# Altium PCB NonRGB-v1.PcbDoc (part 1 of 2)
Units mil, origin at the board's own origin, x right, y up, seen from the top; angles counter-clockwise.
Board outline 14224 x 14224 mil, 4 copper layers (Top Layer, Internal Plane 1, Internal Plane 2, Bottom Layer), stack 18.2 mil thick; 328 components, 111 nets, 825 pads, 445 vias.
Unrouted connection lines stored in the file: 71.
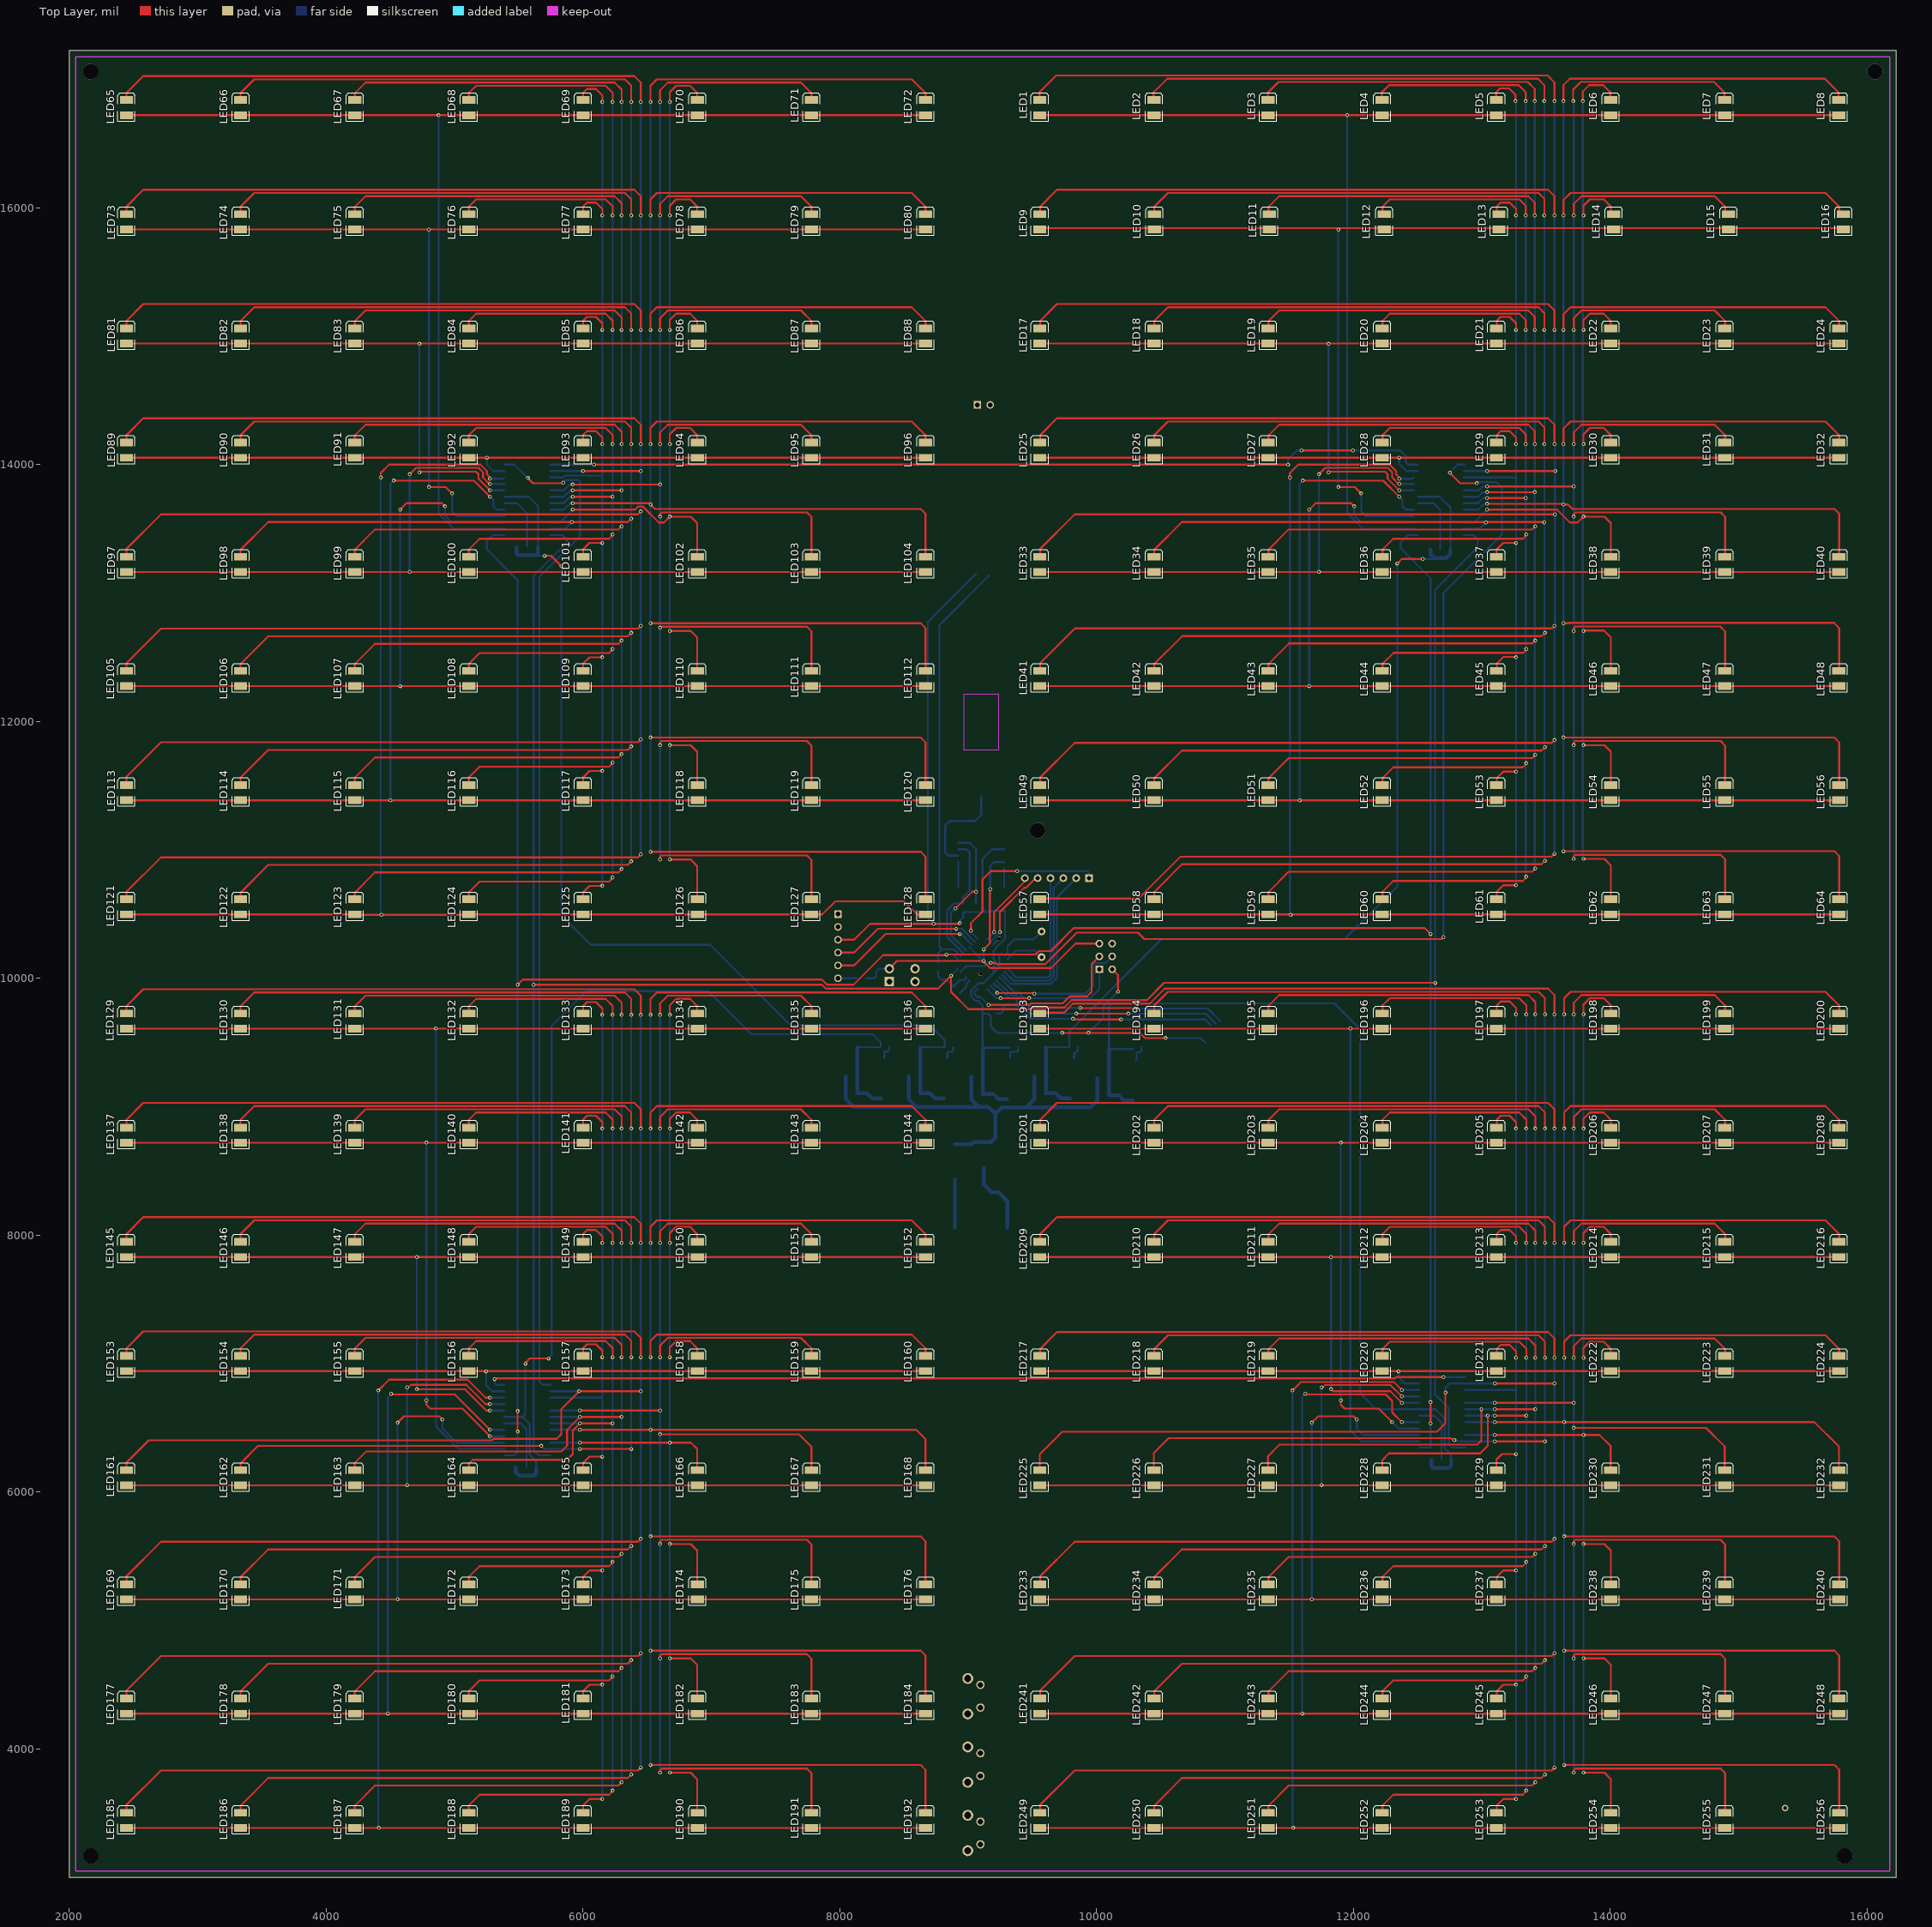
[diagram p0: Top Layer view]
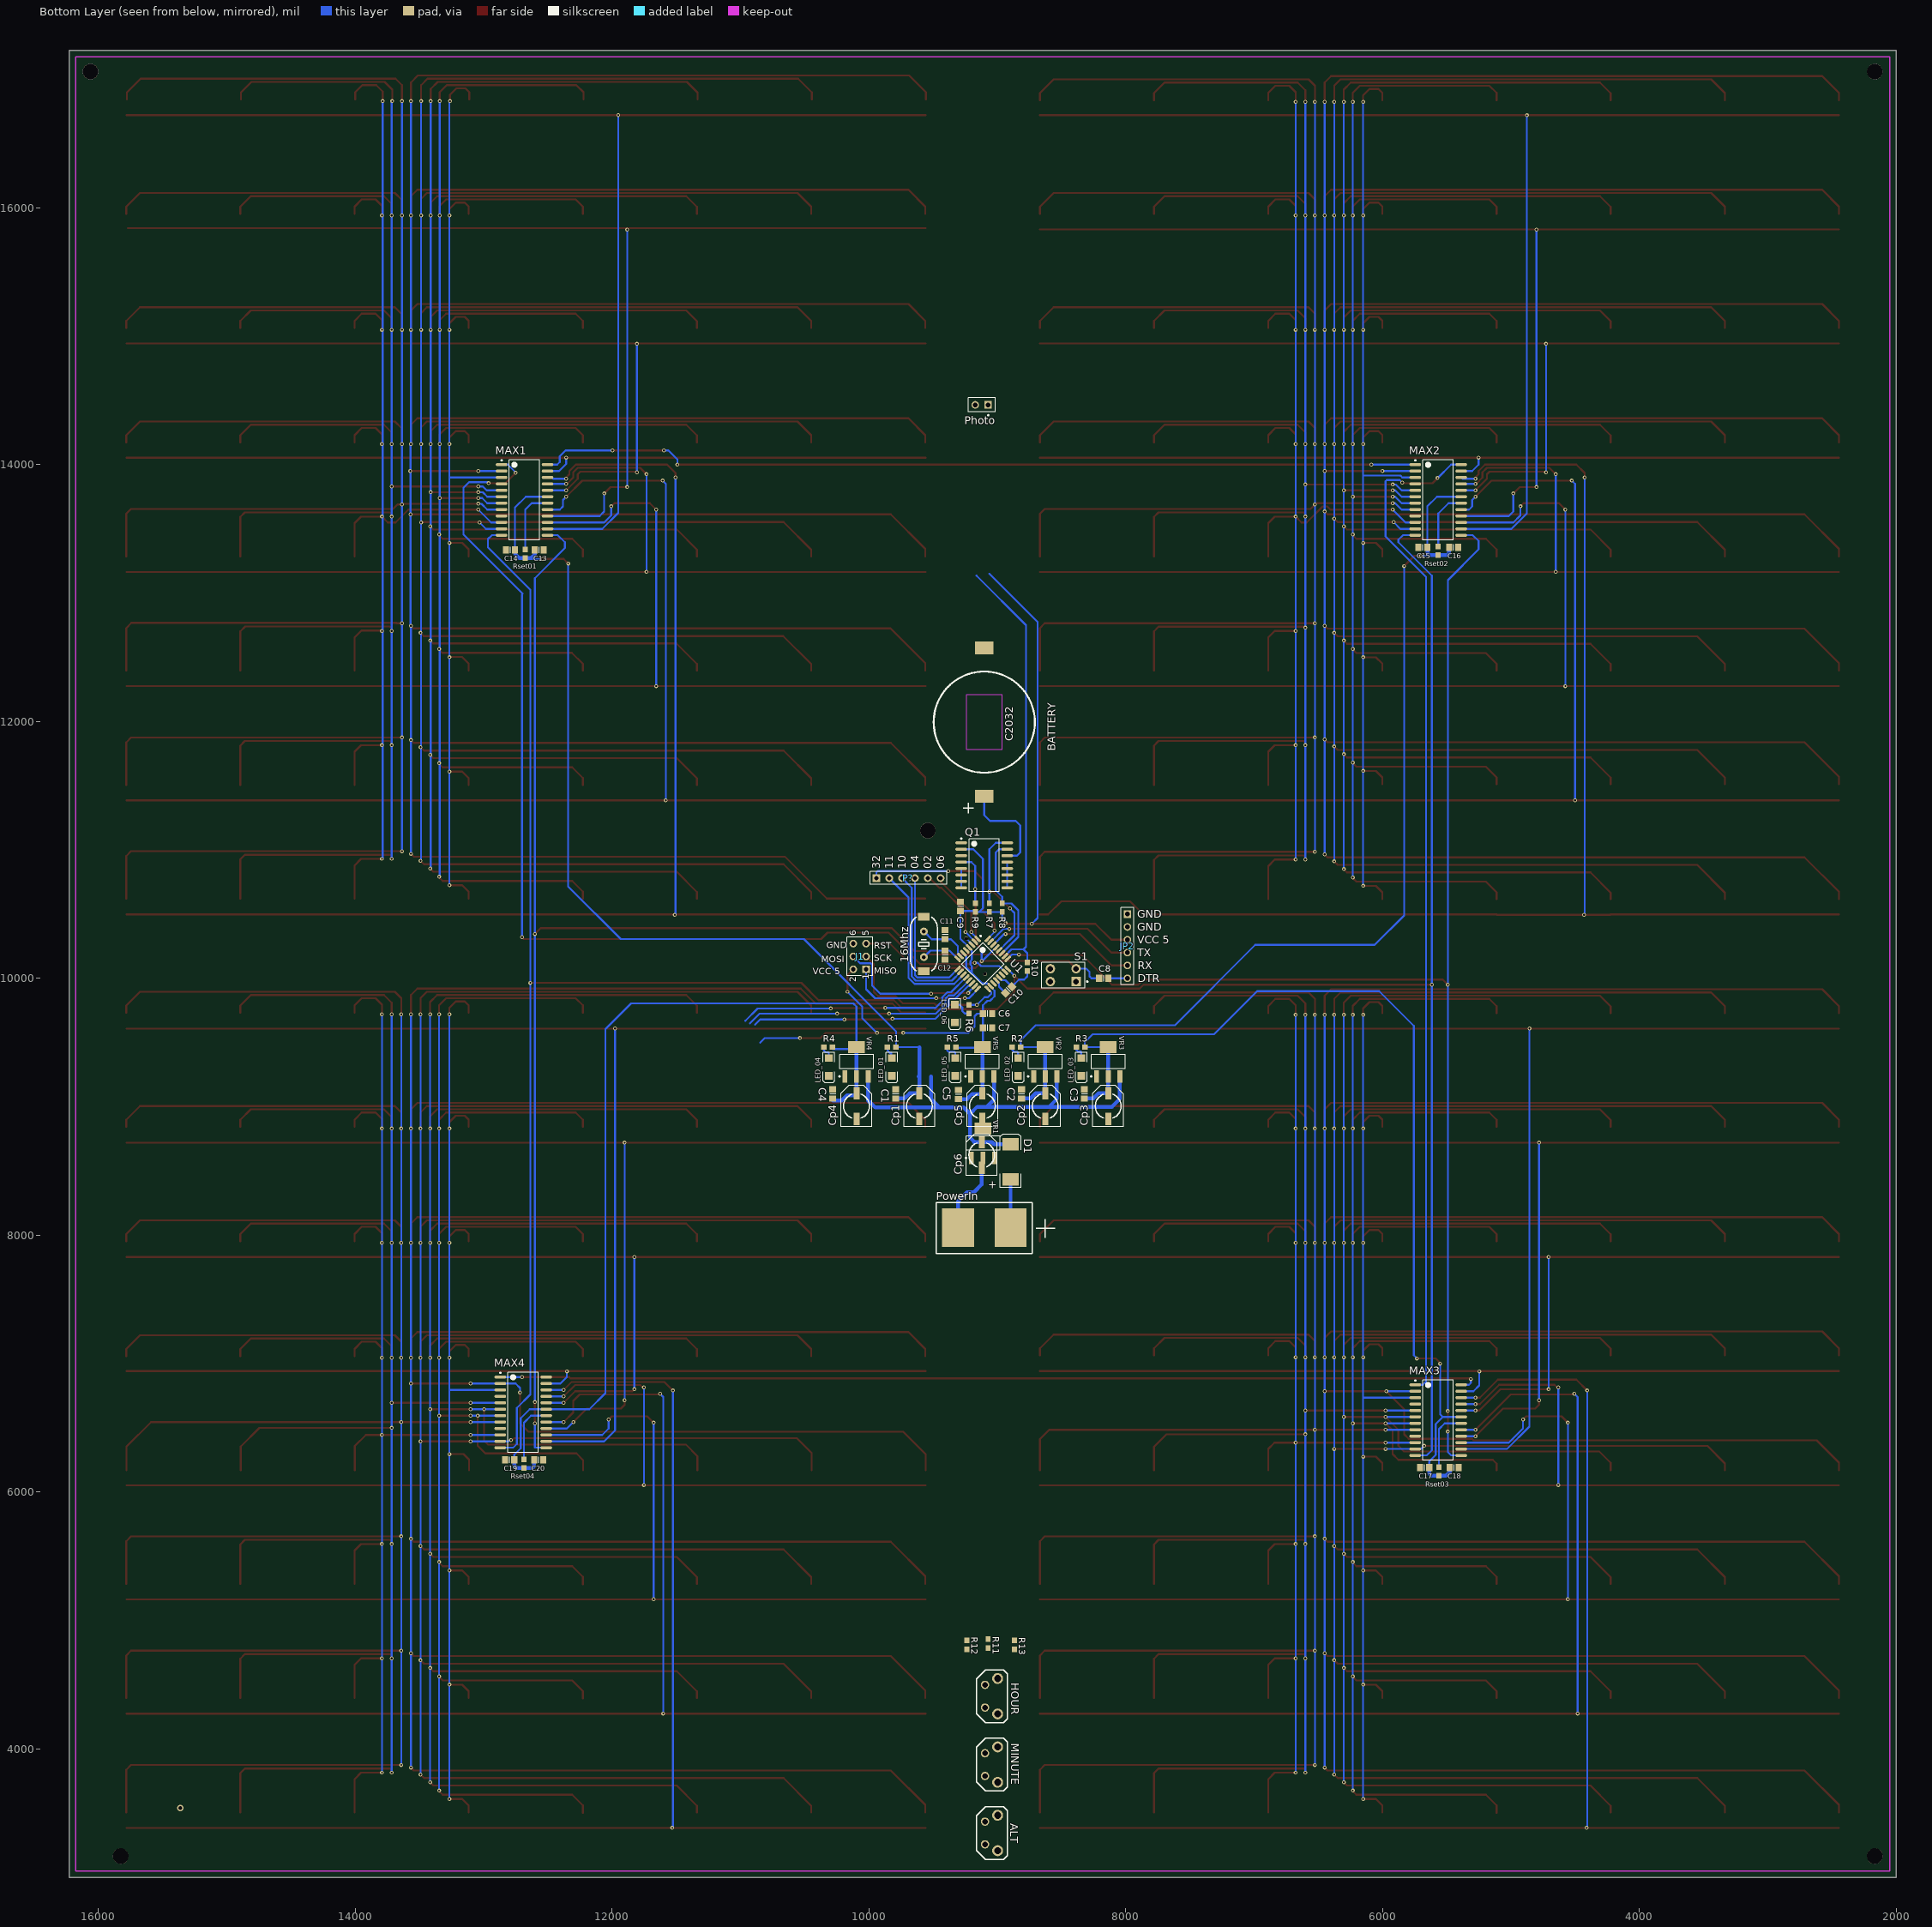
[diagram p1: Bottom Layer view, seen from below]
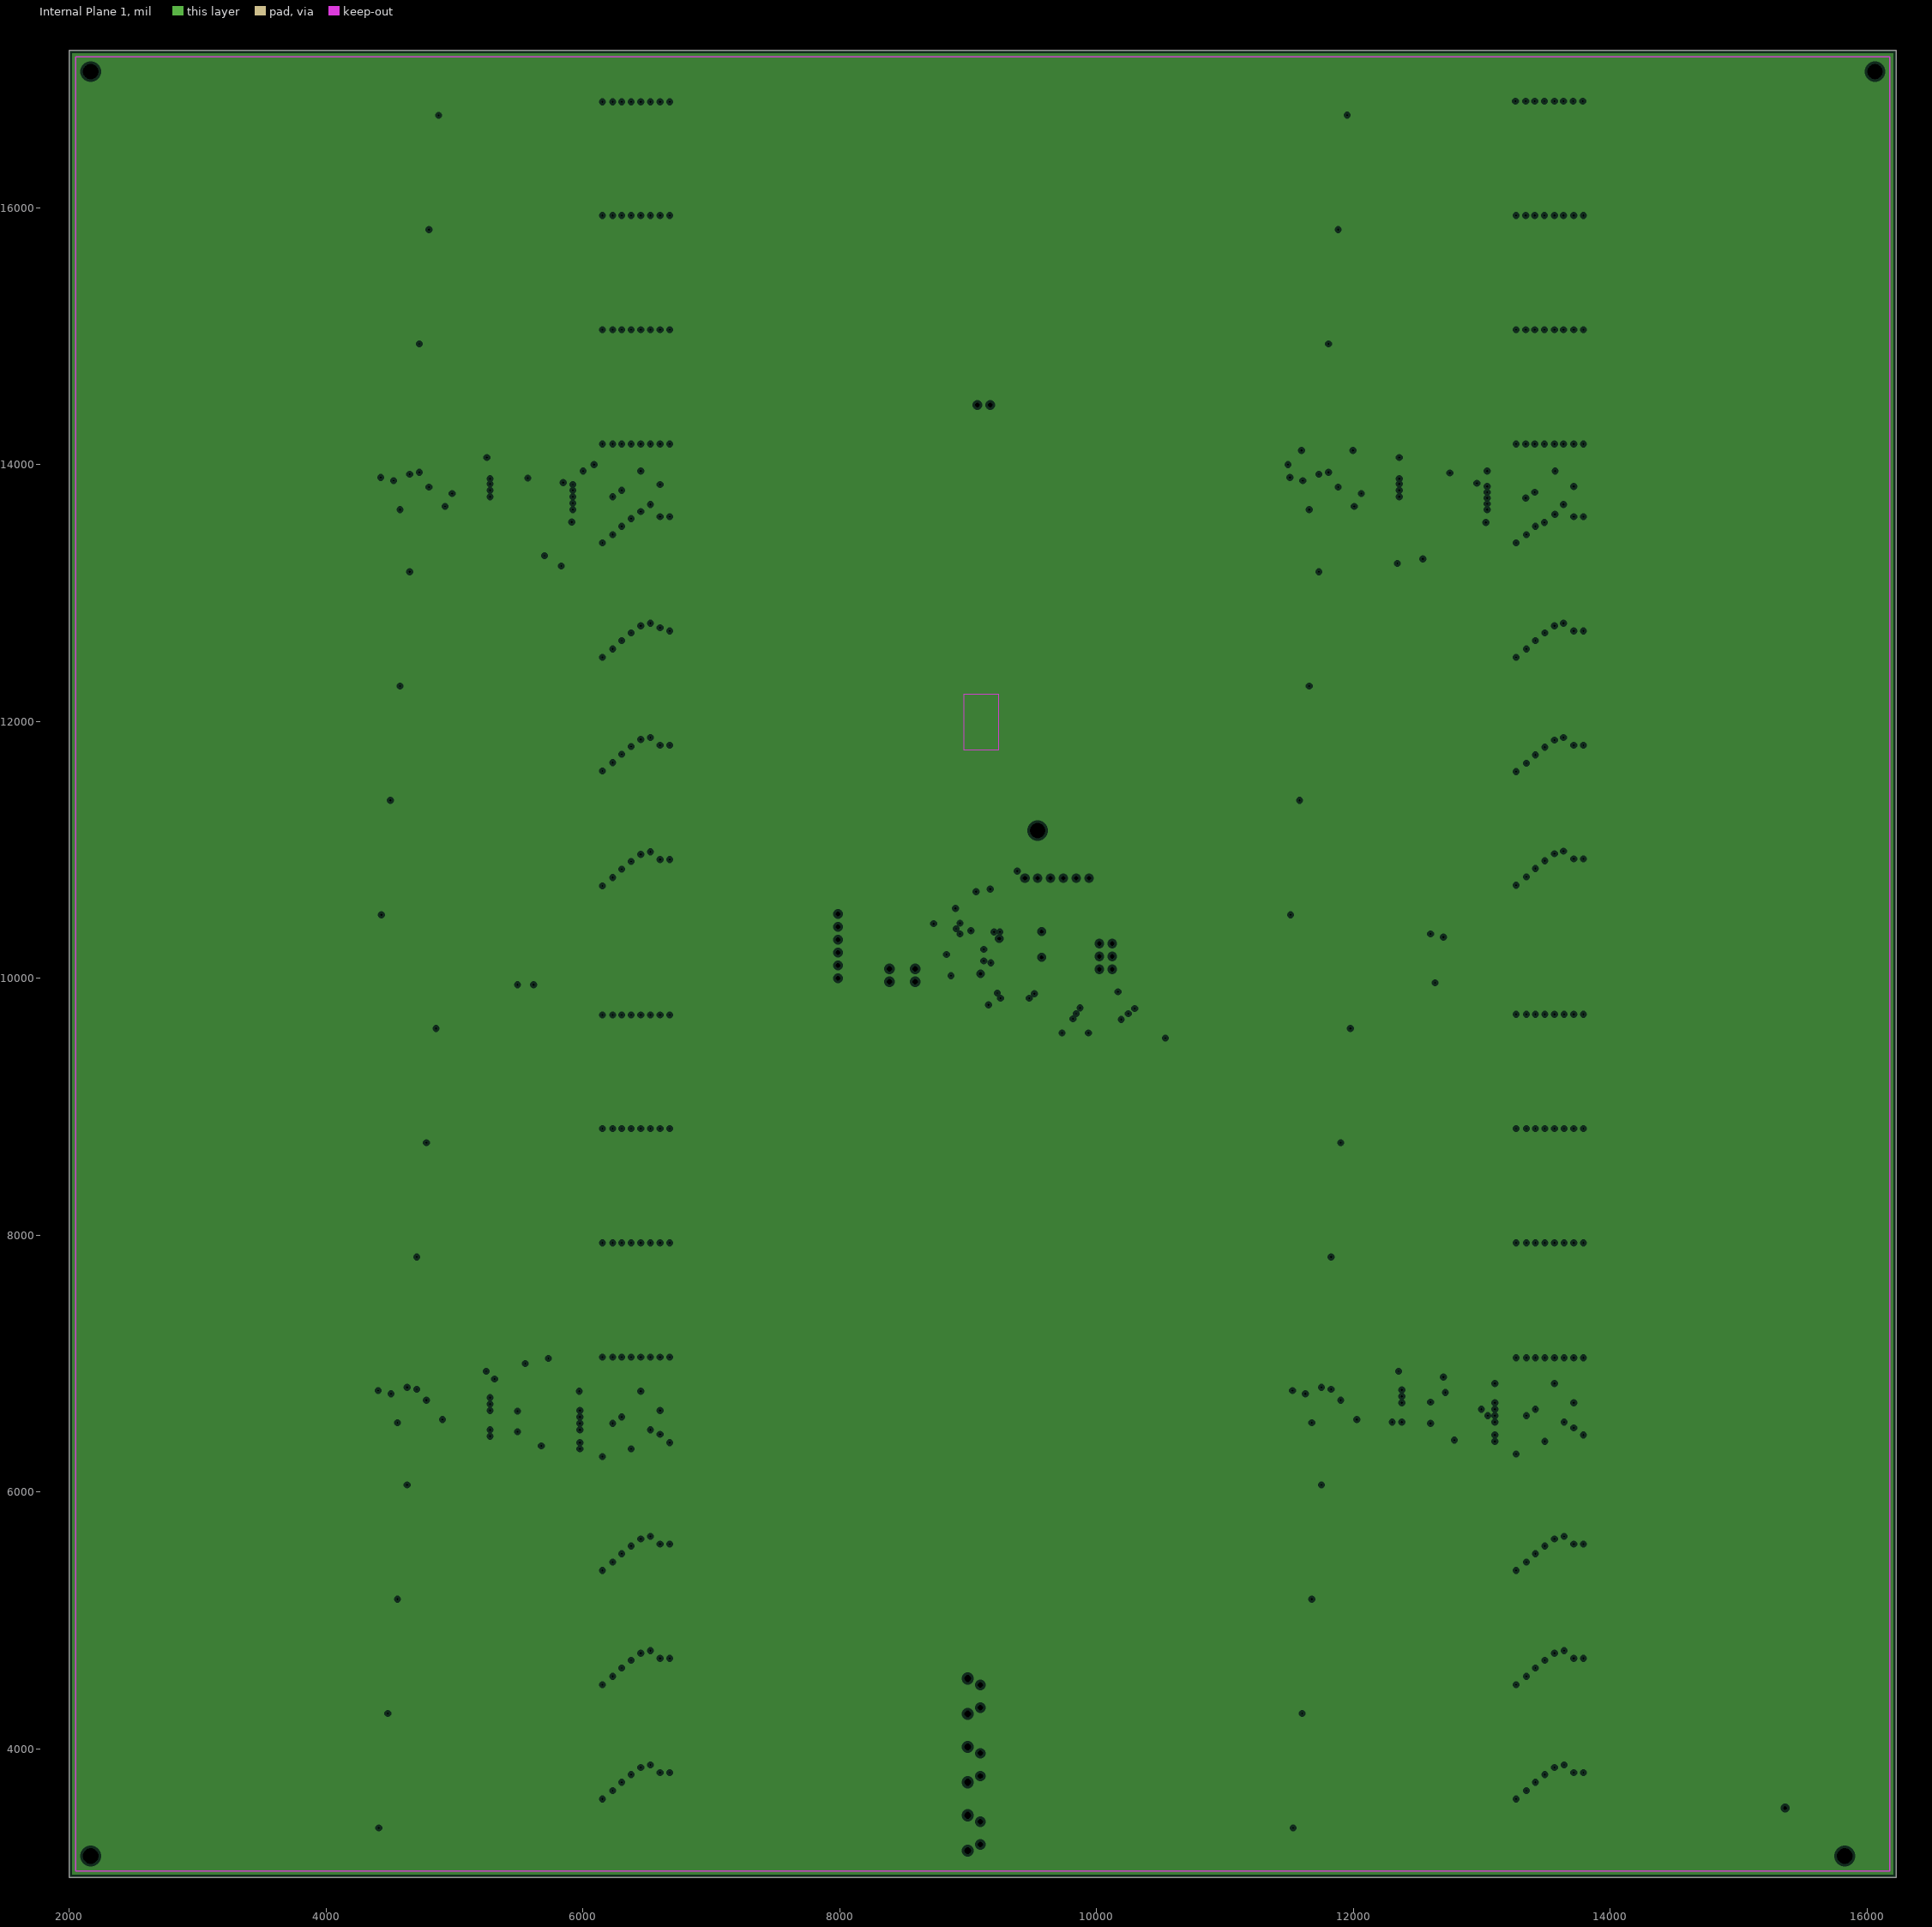
[diagram p2: Internal Plane 1, clearances drawn from the general rule]
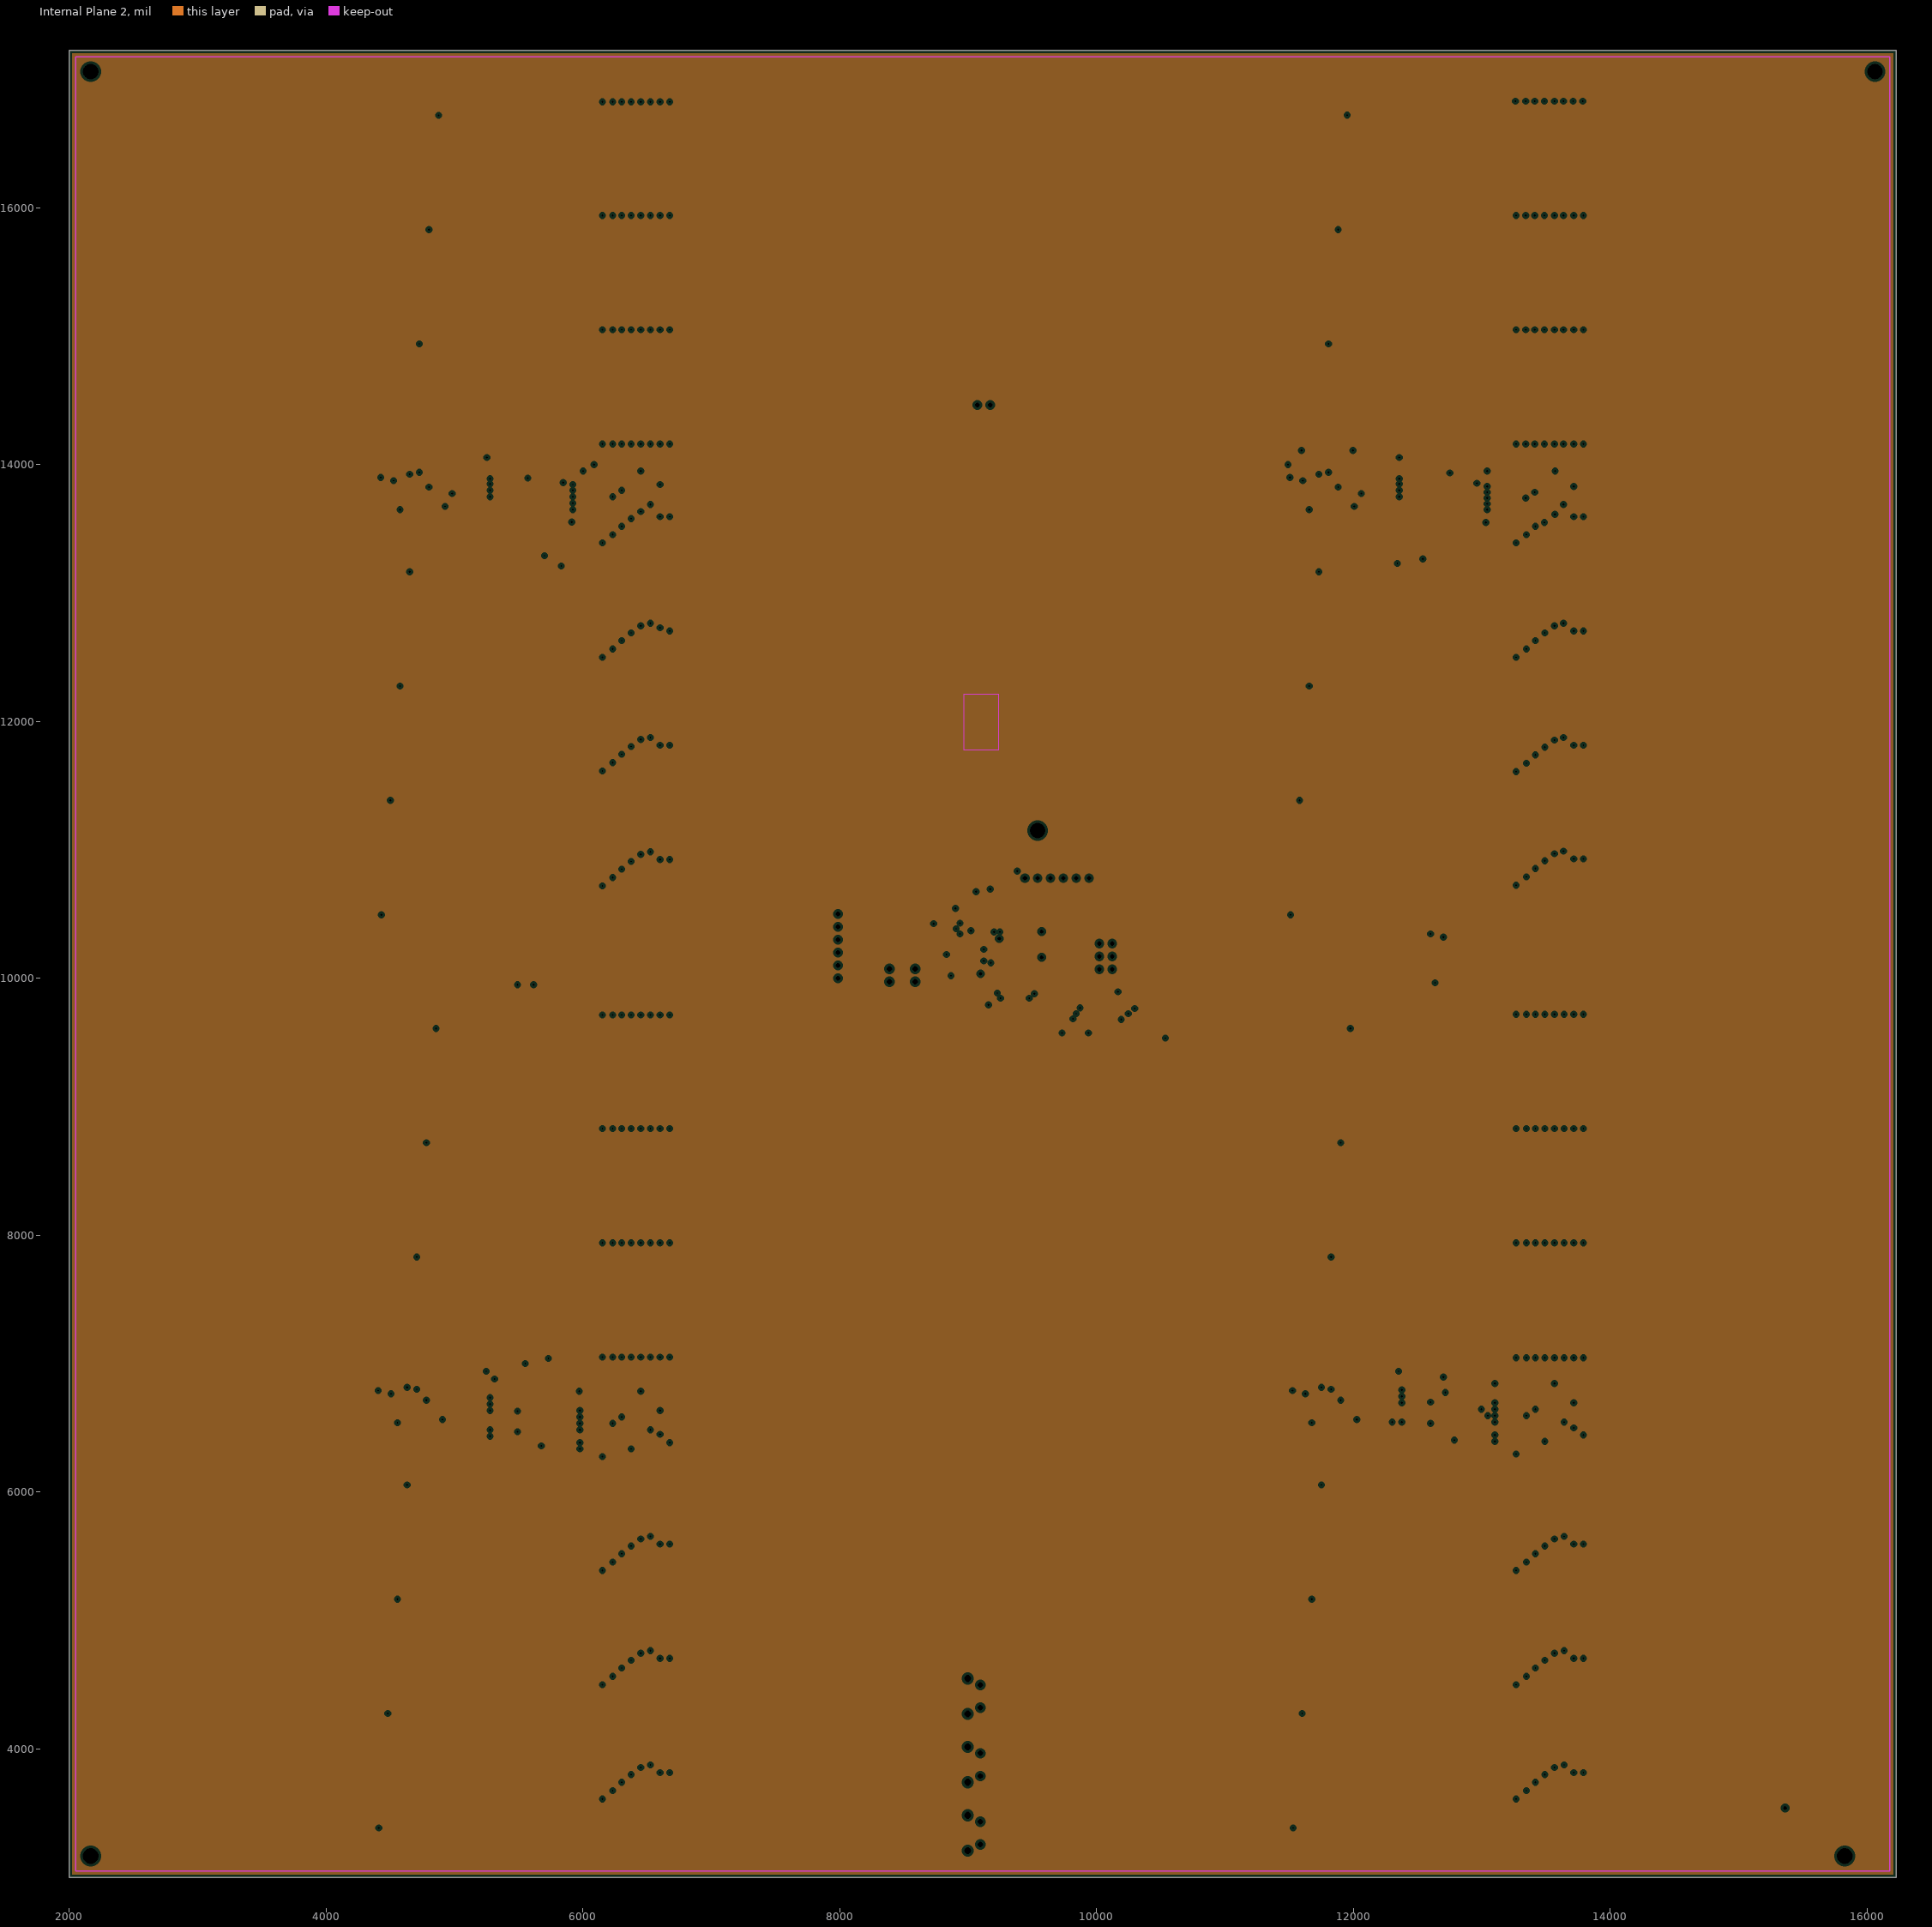
[diagram p3: Internal Plane 2, clearances drawn from the general rule]

## Layer stack, top to bottom
Top Solder: solder mask 0.4, Solder Resist, Dk 3.5
Top Layer: signal copper 1.4
Internal Plane 1: plane copper 1.4
Internal Plane 2: plane copper 1.4
Dielectric 1: dielectric 12.6, FR-4, Dk 4.8
Bottom Layer: signal copper 1.4
Bottom Solder: solder mask 0.4, Solder Resist, Dk 3.5

## Board outline
2000,3000 16224,3000 16224,17224 2000,17224

## Design rules (kind name [scope] priority, off if disabled: settings)
Clearance [All] p1: gap=5
PlaneClearance [All] p1: clearance=20
PlaneConnect [All] p1: planeconnectstyle=Relief reliefexpansion=20 reliefentries=4 reliefconductorwidth=15 reliefairgap=10
PolygonConnect [All] p1: connectstyle=Relief reliefconductorwidth=15 reliefentries=4 polygonreliefangle="90 Angle" airgapwidth=10
RoutingVias [All] p1: holewidth=15 width=30 viastyle="Through Hole" minholewidth=15 minwidth=30 maxholewidth=28 maxwidth=50
SolderMaskExpansion [All] p1: expansion=4
Width [All] p1: maxlimit=30 minlimit=10 preferedwidth=15 minimp=50.000000 maximp=50.000000 favimp=50.000000
28 further rules are at their usual default settings.

## Classes and differential pairs
component class U_LED_Driver_and_LEDs_01: C13 C14 LED1 LED2 LED3 LED4 LED5 LED6 LED7 LED8 LED9 LED10 LED11 LED12 LED13 LED14 LED15 LED16 LED17 LED18 LED19 LED20 LED21 LED22 LED23 LED24 LED25 LED26 LED27 LED28 LED29 LED30 LED31 LED32 LED33 LED34 LED35 LED36 LED37 LED38 LED39 LED40 LED41 LED42 LED43 LED44 LED45 LED46 LED47 LED48 LED49 LED50 LED51 LED52 LED53 LED54 LED55 LED56 LED57 LED58 LED59 LED60 LED61 LED62 LED63 LED64 MAX1 Rset01
component class U_LED_Driver_and_LEDs_02: C15 C16 LED65 LED66 LED67 LED68 LED69 LED70 LED71 LED72 LED73 LED74 LED75 LED76 LED77 LED78 LED79 LED80 LED81 LED82 LED83 LED84 LED85 LED86 LED87 LED88 LED89 LED90 LED91 LED92 LED93 LED94 LED95 LED96 LED97 LED98 LED99 LED100 LED101 LED102 LED103 LED104 LED105 LED106 LED107 LED108 LED109 LED110 LED111 LED112 LED113 LED114 LED115 LED116 LED117 LED118 LED119 LED120 LED121 LED122 LED123 LED124 LED125 LED126 LED127 LED128 MAX2 Rset02
component class U_LED_Driver_and_LEDs_03: C17 C18 LED129 LED130 LED131 LED132 LED133 LED134 LED135 LED136 LED137 LED138 LED139 LED140 LED141 LED142 LED143 LED144 LED145 LED146 LED147 LED148 LED149 LED150 LED151 LED152 LED153 LED154 LED155 LED156 LED157 LED158 LED159 LED160 LED161 LED162 LED163 LED164 LED165 LED166 LED167 LED168 LED169 LED170 LED171 LED172 LED173 LED174 LED175 LED176 LED177 LED178 LED179 LED180 LED181 LED182 LED183 LED184 LED185 LED186 LED187 LED188 LED189 LED190 LED191 LED192 MAX3 Rset03
component class U_LED_Driver_and_LEDs_04: C19 C20 LED193 LED194 LED195 LED196 LED197 LED198 LED199 LED200 LED201 LED202 LED203 LED204 LED205 LED206 LED207 LED208 LED209 LED210 LED211 LED212 LED213 LED214 LED215 LED216 LED217 LED218 LED219 LED220 LED221 LED222 LED223 LED224 LED225 LED226 LED227 LED228 LED229 LED230 LED231 LED232 LED233 LED234 LED235 LED236 LED237 LED238 LED239 LED240 LED241 LED242 LED243 LED244 LED245 LED246 LED247 LED248 LED249 LED250 LED251 LED252 LED253 LED254 LED255 LED256 MAX4 Rset04
component class U_PowerSystem: C1 C2 C3 C4 C5 Cp1 Cp2 Cp3 Cp4 Cp5 Cp6 D1 LED_01 LED_02 LED_03 LED_04 LED_05 PowerIn R1 R2 R3 R4 R5 VR1 VR2 VR3 VR4 VR5
component class U_Schematics: 16Mhz ALT ATmega328 BATTERY C6 C7 C8 C9 C10 C11 C12 HOUR J1 JP2 LED_06 MINUTE P? Photo Q1 R6 R7 R8 R9 R10 R11 R12 R13 S1 U1

## Components (designator, comment, footprint, x,y, rotation, side; value= is the part's Value field where it differs from the comment)
16Mhz "Crystal Oscillator" "Crystal Oscillator" 9570,10265 r270 bottom (schematic designator Cryst_01)
ALT "Header 2" "RightAngle Tactile Switch" 9045,3345 r270 bottom (schematic designator SW3)
BATTERY "2032 Battery Holder, SMT" "C2032 Battery Holder" 9100,11995 r90 bottom (schematic designator BAT1)
C1 "Cap Semi" 6-0805_N 9790,9100 r270 bottom
C2 "Cap Semi" 6-0805_N 8810,9100 r270 bottom
C3 "Cap Semi" 6-0805_N 8320,9100 r270 bottom
C4 "Cap Semi" 6-0805_N 10280,9100 r270 bottom
C5 "Cap Semi" 6-0805_N 9300,9095 r270 bottom
C6 "Cap Semi" 6-0805_N 9075,9725 r180 bottom
C7 "Cap Semi" 6-0805_N 9075,9615 r180 bottom
C8 "Cap Semi" 6-0805_N 8170,10000 r0 bottom
C9 "Cap Semi" 6-0805_N 9285,10560 r270 bottom
C10 "Cap Semi" 6-0805_N 8910,9910 r315 bottom
C11 "Cap Semi" 6-0805_N 9405,10340 r90 bottom
C12 "Cap Semi" 6-0805_N 9405,10180 r270 bottom
C13 "Cap Semi" 6-0805_N 12565,13335 r180 bottom
C14 "Cap Semi" 6-0805_N 12790,13335 r0 bottom
C15 "Cap Semi" 6-0805_N 5685,13355 r0 bottom
C16 "Cap Semi" 6-0805_N 5445,13355 r180 bottom
C17 "Cap Semi" 6-0805_N 5670,6190 r0 bottom
C18 "Cap Semi" 6-0805_N 5440,6190 r180 bottom
C19 "Cap Semi" 6-0805_N 12795,6250 r0 bottom
C20 "Cap Semi" 6-0805_N 12570,6250 r180 bottom
Cp1 "Cap Pol3" 1CA470WR 9605,9005 r90 bottom
Cp2 "Cap Pol3" 1CA470WR 8625,9005 r90 bottom
Cp3 "Cap Pol3" 1CA470WR 8135,9005 r90 bottom
Cp4 "Cap Pol3" 1CA470WR 10095,9005 r90 bottom
Cp5 "Cap Pol3" 1CA470WR 9115,9005 r90 bottom
Cp6 "Cap Pol3" 1CA470WR 9119.38,8625 r90 bottom
D1 "Diode" SMC 8895,8571.42 r90 bottom
HOUR "Header 2" "RightAngle Tactile Switch" 9045,4410 r270 bottom (schematic designator SW1)
J1 "ICSP" HDR2X3 10020,10070 r90 bottom
JP2 "UART" HDR1X6 7985,10500 r270 bottom
LED1 "LED3" 3.5X2.8X1.9 9556,16779.5 r90 top
LED2 "LED3" 3.5X2.8X1.9 10445,16779.5 r90 top
LED3 "LED3" 3.5X2.8X1.9 11334,16779.5 r90 top
LED4 "LED3" 3.5X2.8X1.9 12223,16779.5 r90 top
LED5 "LED3" 3.5X2.8X1.9 13112,16779.5 r90 top
LED6 "LED3" 3.5X2.8X1.9 14001,16779.5 r90 top
LED7 "LED3" 3.5X2.8X1.9 14890,16779.5 r90 top
LED8 "LED3" 3.5X2.8X1.9 15779,16779.5 r90 top
LED9 "LED3" 3.5X2.8X1.9 9556,15890.5 r90 top
LED10 "LED3" 3.5X2.8X1.9 10450,15890.5 r90 top
LED11 "LED3" 3.5X2.8X1.9 11344,15890.5 r90 top
LED12 "LED3" 3.5X2.8X1.9 12238,15890.5 r90 top
LED13 "LED3" 3.5X2.8X1.9 13132,15890.5 r90 top
LED14 "LED3" 3.5X2.8X1.9 14026,15890.5 r90 top
LED15 "LED3" 3.5X2.8X1.9 14920,15890.5 r90 top
LED16 "LED3" 3.5X2.8X1.9 15814,15890.5 r90 top
LED17 "LED3" 3.5X2.8X1.9 9556,15001.5 r90 top
LED18 "LED3" 3.5X2.8X1.9 10445,15001.5 r90 top
LED19 "LED3" 3.5X2.8X1.9 11334,15001.5 r90 top
LED20 "LED3" 3.5X2.8X1.9 12223,15001.5 r90 top
LED21 "LED3" 3.5X2.8X1.9 13112,15001.5 r90 top
LED22 "LED3" 3.5X2.8X1.9 14001,15001.5 r90 top
LED23 "LED3" 3.5X2.8X1.9 14890,15001.5 r90 top
LED24 "LED3" 3.5X2.8X1.9 15779,15001.5 r90 top
LED25 "LED3" 3.5X2.8X1.9 9556,14112.5 r90 top
LED26 "LED3" 3.5X2.8X1.9 10445,14112.5 r90 top
LED27 "LED3" 3.5X2.8X1.9 11334,14112.5 r90 top
LED28 "LED3" 3.5X2.8X1.9 12223,14112.5 r90 top
LED29 "LED3" 3.5X2.8X1.9 13112,14112.5 r90 top
LED30 "LED3" 3.5X2.8X1.9 14001,14112.5 r90 top
LED31 "LED3" 3.5X2.8X1.9 14890,14112.5 r90 top
LED32 "LED3" 3.5X2.8X1.9 15779,14112.5 r90 top
LED33 "LED3" 3.5X2.8X1.9 9556,13223.5 r90 top
LED34 "LED3" 3.5X2.8X1.9 10445,13223.5 r90 top
LED35 "LED3" 3.5X2.8X1.9 11334,13223.5 r90 top
LED36 "LED3" 3.5X2.8X1.9 12223,13223.5 r90 top
LED37 "LED3" 3.5X2.8X1.9 13112,13223.5 r90 top
LED38 "LED3" 3.5X2.8X1.9 14001,13223.5 r90 top
LED39 "LED3" 3.5X2.8X1.9 14890,13223.5 r90 top
LED40 "LED3" 3.5X2.8X1.9 15779,13223.5 r90 top
LED41 "LED3" 3.5X2.8X1.9 9556,12334.5 r90 top
LED42 "LED3" 3.5X2.8X1.9 10445,12334.5 r90 top
LED43 "LED3" 3.5X2.8X1.9 11334,12334.5 r90 top
LED44 "LED3" 3.5X2.8X1.9 12223,12334.5 r90 top
LED45 "LED3" 3.5X2.8X1.9 13112,12334.5 r90 top
LED46 "LED3" 3.5X2.8X1.9 14001,12334.5 r90 top
LED47 "LED3" 3.5X2.8X1.9 14890,12334.5 r90 top
LED48 "LED3" 3.5X2.8X1.9 15779,12334.5 r90 top
LED49 "LED3" 3.5X2.8X1.9 9556,11445.5 r90 top
LED50 "LED3" 3.5X2.8X1.9 10445,11445.5 r90 top
LED51 "LED3" 3.5X2.8X1.9 11334,11445.5 r90 top
LED52 "LED3" 3.5X2.8X1.9 12223,11445.5 r90 top
LED53 "LED3" 3.5X2.8X1.9 13112,11445.5 r90 top
LED54 "LED3" 3.5X2.8X1.9 14001,11445.5 r90 top
LED55 "LED3" 3.5X2.8X1.9 14890,11445.5 r90 top
LED56 "LED3" 3.5X2.8X1.9 15779,11445.5 r90 top
LED57 "LED3" 3.5X2.8X1.9 9556,10556.5 r90 top
LED58 "LED3" 3.5X2.8X1.9 10445,10556.5 r90 top
LED59 "LED3" 3.5X2.8X1.9 11334,10556.5 r90 top
LED60 "LED3" 3.5X2.8X1.9 12223,10556.5 r90 top
LED61 "LED3" 3.5X2.8X1.9 13112,10556.5 r90 top
LED62 "LED3" 3.5X2.8X1.9 14001,10556.5 r90 top
LED63 "LED3" 3.5X2.8X1.9 14890,10556.5 r90 top
LED64 "LED3" 3.5X2.8X1.9 15779,10556.5 r90 top
LED65 "LED3" 3.5X2.8X1.9 2444,16779.5 r90 top
LED66 "LED3" 3.5X2.8X1.9 3333,16779.5 r90 top
LED67 "LED3" 3.5X2.8X1.9 4222,16779.5 r90 top
LED68 "LED3" 3.5X2.8X1.9 5111,16779.5 r90 top
LED69 "LED3" 3.5X2.8X1.9 6000,16779.5 r90 top
LED70 "LED3" 3.5X2.8X1.9 6889,16779.5 r90 top
LED71 "LED3" 3.5X2.8X1.9 7778,16779.5 r90 top
LED72 "LED3" 3.5X2.8X1.9 8667,16779.5 r90 top
LED73 "LED3" 3.5X2.8X1.9 2444,15890.5 r90 top
LED74 "LED3" 3.5X2.8X1.9 3333,15890.5 r90 top
LED75 "LED3" 3.5X2.8X1.9 4222,15890.5 r90 top
LED76 "LED3" 3.5X2.8X1.9 5111,15890.5 r90 top
LED77 "LED3" 3.5X2.8X1.9 6000,15890.5 r90 top
LED78 "LED3" 3.5X2.8X1.9 6889,15890.5 r90 top
LED79 "LED3" 3.5X2.8X1.9 7778,15890.5 r90 top
LED80 "LED3" 3.5X2.8X1.9 8667,15890.5 r90 top
LED81 "LED3" 3.5X2.8X1.9 2444,15001.5 r90 top
LED82 "LED3" 3.5X2.8X1.9 3333,15001.5 r90 top
LED83 "LED3" 3.5X2.8X1.9 4222,15001.5 r90 top
LED84 "LED3" 3.5X2.8X1.9 5111,15001.5 r90 top
LED85 "LED3" 3.5X2.8X1.9 6000,15001.5 r90 top
LED86 "LED3" 3.5X2.8X1.9 6889,15001.5 r90 top
LED87 "LED3" 3.5X2.8X1.9 7778,15001.5 r90 top
LED88 "LED3" 3.5X2.8X1.9 8667,15001.5 r90 top
LED89 "LED3" 3.5X2.8X1.9 2444,14112.5 r90 top
LED90 "LED3" 3.5X2.8X1.9 3333,14112.5 r90 top
LED91 "LED3" 3.5X2.8X1.9 4222,14112.5 r90 top
LED92 "LED3" 3.5X2.8X1.9 5111,14112.5 r90 top
LED93 "LED3" 3.5X2.8X1.9 6000,14112.5 r90 top
LED94 "LED3" 3.5X2.8X1.9 6889,14112.5 r90 top
LED95 "LED3" 3.5X2.8X1.9 7778,14112.5 r90 top
LED96 "LED3" 3.5X2.8X1.9 8667,14112.5 r90 top
LED97 "LED3" 3.5X2.8X1.9 2444,13223.5 r90 top
LED98 "LED3" 3.5X2.8X1.9 3333,13223.5 r90 top
LED99 "LED3" 3.5X2.8X1.9 4222,13223.5 r90 top
LED100 "LED3" 3.5X2.8X1.9 5111,13223.5 r90 top
LED101 "LED3" 3.5X2.8X1.9 6000,13223.5 r90 top
LED102 "LED3" 3.5X2.8X1.9 6889,13223.5 r90 top
LED103 "LED3" 3.5X2.8X1.9 7778,13223.5 r90 top
LED104 "LED3" 3.5X2.8X1.9 8667,13223.5 r90 top
LED105 "LED3" 3.5X2.8X1.9 2444,12334.5 r90 top
LED106 "LED3" 3.5X2.8X1.9 3333,12334.5 r90 top
LED107 "LED3" 3.5X2.8X1.9 4222,12334.5 r90 top
LED108 "LED3" 3.5X2.8X1.9 5111,12334.5 r90 top
LED109 "LED3" 3.5X2.8X1.9 6000,12334.5 r90 top
LED110 "LED3" 3.5X2.8X1.9 6889,12334.5 r90 top
LED111 "LED3" 3.5X2.8X1.9 7778,12334.5 r90 top
LED112 "LED3" 3.5X2.8X1.9 8667,12334.5 r90 top
LED113 "LED3" 3.5X2.8X1.9 2444,11445.5 r90 top
LED114 "LED3" 3.5X2.8X1.9 3333,11445.5 r90 top
LED115 "LED3" 3.5X2.8X1.9 4222,11445.5 r90 top
LED116 "LED3" 3.5X2.8X1.9 5111,11445.5 r90 top
LED117 "LED3" 3.5X2.8X1.9 6000,11445.5 r90 top
LED118 "LED3" 3.5X2.8X1.9 6889,11445.5 r90 top
LED119 "LED3" 3.5X2.8X1.9 7778,11445.5 r90 top
LED120 "LED3" 3.5X2.8X1.9 8667,11445.5 r90 top
LED121 "LED3" 3.5X2.8X1.9 2444,10556.5 r90 top
LED122 "LED3" 3.5X2.8X1.9 3333,10556.5 r90 top
LED123 "LED3" 3.5X2.8X1.9 4222,10556.5 r90 top
LED124 "LED3" 3.5X2.8X1.9 5111,10556.5 r90 top
LED125 "LED3" 3.5X2.8X1.9 6000,10556.5 r90 top
LED126 "LED3" 3.5X2.8X1.9 6889,10556.5 r90 top
LED127 "LED3" 3.5X2.8X1.9 7778,10556.5 r90 top
LED128 "LED3" 3.5X2.8X1.9 8667,10556.5 r90 top
LED129 "LED3" 3.5X2.8X1.9 2444,9667.5 r90 top
LED130 "LED3" 3.5X2.8X1.9 3333,9667.5 r90 top
LED131 "LED3" 3.5X2.8X1.9 4222,9667.5 r90 top
LED132 "LED3" 3.5X2.8X1.9 5111,9667.5 r90 top
LED133 "LED3" 3.5X2.8X1.9 6000,9667.5 r90 top
LED134 "LED3" 3.5X2.8X1.9 6889,9667.5 r90 top
LED135 "LED3" 3.5X2.8X1.9 7778,9667.5 r90 top
LED136 "LED3" 3.5X2.8X1.9 8667,9667.5 r90 top
LED137 "LED3" 3.5X2.8X1.9 2444,8778.5 r90 top
LED138 "LED3" 3.5X2.8X1.9 3333,8778.5 r90 top
LED139 "LED3" 3.5X2.8X1.9 4222,8778.5 r90 top
LED140 "LED3" 3.5X2.8X1.9 5111,8778.5 r90 top
LED141 "LED3" 3.5X2.8X1.9 6000,8778.5 r90 top
LED142 "LED3" 3.5X2.8X1.9 6889,8778.5 r90 top
LED143 "LED3" 3.5X2.8X1.9 7778,8778.5 r90 top
LED144 "LED3" 3.5X2.8X1.9 8667,8778.5 r90 top
LED145 "LED3" 3.5X2.8X1.9 2444,7889.5 r90 top
LED146 "LED3" 3.5X2.8X1.9 3333,7889.5 r90 top
LED147 "LED3" 3.5X2.8X1.9 4222,7889.5 r90 top
LED148 "LED3" 3.5X2.8X1.9 5111,7889.5 r90 top
LED149 "LED3" 3.5X2.8X1.9 6000,7889.5 r90 top
LED150 "LED3" 3.5X2.8X1.9 6889,7889.5 r90 top
LED151 "LED3" 3.5X2.8X1.9 7778,7889.5 r90 top
LED152 "LED3" 3.5X2.8X1.9 8667,7889.5 r90 top
LED153 "LED3" 3.5X2.8X1.9 2444,7000.5 r90 top
LED154 "LED3" 3.5X2.8X1.9 3333,7000.5 r90 top
LED155 "LED3" 3.5X2.8X1.9 4222,7000.5 r90 top
LED156 "LED3" 3.5X2.8X1.9 5111,7000.5 r90 top
LED157 "LED3" 3.5X2.8X1.9 6000,7000.5 r90 top
LED158 "LED3" 3.5X2.8X1.9 6889,7000.5 r90 top
LED159 "LED3" 3.5X2.8X1.9 7778,7000.5 r90 top
LED160 "LED3" 3.5X2.8X1.9 8667,7000.5 r90 top
LED161 "LED3" 3.5X2.8X1.9 2444,6111.5 r90 top
LED162 "LED3" 3.5X2.8X1.9 3333,6111.5 r90 top
LED163 "LED3" 3.5X2.8X1.9 4222,6111.5 r90 top
LED164 "LED3" 3.5X2.8X1.9 5111,6111.5 r90 top
LED165 "LED3" 3.5X2.8X1.9 6000,6111.5 r90 top
LED166 "LED3" 3.5X2.8X1.9 6889,6111.5 r90 top
LED167 "LED3" 3.5X2.8X1.9 7778,6111.5 r90 top
LED168 "LED3" 3.5X2.8X1.9 8667,6111.5 r90 top
LED169 "LED3" 3.5X2.8X1.9 2444,5222.5 r90 top
LED170 "LED3" 3.5X2.8X1.9 3333,5222.5 r90 top
LED171 "LED3" 3.5X2.8X1.9 4222,5222.5 r90 top
LED172 "LED3" 3.5X2.8X1.9 5111,5222.5 r90 top
LED173 "LED3" 3.5X2.8X1.9 6000,5222.5 r90 top
LED174 "LED3" 3.5X2.8X1.9 6889,5222.5 r90 top
LED175 "LED3" 3.5X2.8X1.9 7778,5222.5 r90 top
LED176 "LED3" 3.5X2.8X1.9 8667,5222.5 r90 top
LED177 "LED3" 3.5X2.8X1.9 2444,4333.5 r90 top
LED178 "LED3" 3.5X2.8X1.9 3333,4333.5 r90 top
LED179 "LED3" 3.5X2.8X1.9 4222,4333.5 r90 top
LED180 "LED3" 3.5X2.8X1.9 5111,4333.5 r90 top
LED181 "LED3" 3.5X2.8X1.9 6000,4333.5 r90 top
LED182 "LED3" 3.5X2.8X1.9 6889,4333.5 r90 top
LED183 "LED3" 3.5X2.8X1.9 7778,4333.5 r90 top
LED184 "LED3" 3.5X2.8X1.9 8667,4333.5 r90 top
LED185 "LED3" 3.5X2.8X1.9 2444,3444 r90 top
LED186 "LED3" 3.5X2.8X1.9 3333,3444 r90 top
LED187 "LED3" 3.5X2.8X1.9 4222,3444 r90 top
LED188 "LED3" 3.5X2.8X1.9 5111,3444 r90 top
LED189 "LED3" 3.5X2.8X1.9 6000,3444 r90 top
LED190 "LED3" 3.5X2.8X1.9 6889,3444 r90 top
LED191 "LED3" 3.5X2.8X1.9 7778,3444 r90 top
LED192 "LED3" 3.5X2.8X1.9 8667,3444 r90 top
LED193 "LED3" 3.5X2.8X1.9 9556,9667.5 r90 top
LED194 "LED3" 3.5X2.8X1.9 10445,9667.5 r90 top
LED195 "LED3" 3.5X2.8X1.9 11334,9667.5 r90 top
LED196 "LED3" 3.5X2.8X1.9 12223,9667.5 r90 top
LED197 "LED3" 3.5X2.8X1.9 13112,9667.5 r90 top
LED198 "LED3" 3.5X2.8X1.9 14001,9667.5 r90 top
LED199 "LED3" 3.5X2.8X1.9 14890,9667.5 r90 top
LED200 "LED3" 3.5X2.8X1.9 15779,9667.5 r90 top
LED201 "LED3" 3.5X2.8X1.9 9556,8778.5 r90 top
LED202 "LED3" 3.5X2.8X1.9 10445,8778.5 r90 top
LED203 "LED3" 3.5X2.8X1.9 11334,8778.5 r90 top
LED204 "LED3" 3.5X2.8X1.9 12223,8778.5 r90 top
LED205 "LED3" 3.5X2.8X1.9 13112,8778.5 r90 top
LED206 "LED3" 3.5X2.8X1.9 14001,8778.5 r90 top
LED207 "LED3" 3.5X2.8X1.9 14890,8778.5 r90 top
LED208 "LED3" 3.5X2.8X1.9 15779,8778.5 r90 top
LED209 "LED3" 3.5X2.8X1.9 9556,7889.5 r90 top
LED210 "LED3" 3.5X2.8X1.9 10445,7889.5 r90 top
LED211 "LED3" 3.5X2.8X1.9 11334,7889.5 r90 top
LED212 "LED3" 3.5X2.8X1.9 12223,7889.5 r90 top
LED213 "LED3" 3.5X2.8X1.9 13112,7889.5 r90 top
LED214 "LED3" 3.5X2.8X1.9 14001,7889.5 r90 top
LED215 "LED3" 3.5X2.8X1.9 14890,7889.5 r90 top
LED216 "LED3" 3.5X2.8X1.9 15779,7889.5 r90 top
LED217 "LED3" 3.5X2.8X1.9 9556,7000.5 r90 top
LED218 "LED3" 3.5X2.8X1.9 10445,7000.5 r90 top
LED219 "LED3" 3.5X2.8X1.9 11334,7000.5 r90 top
LED220 "LED3" 3.5X2.8X1.9 12223,7000.5 r90 top
LED221 "LED3" 3.5X2.8X1.9 13112,7000.5 r90 top
LED222 "LED3" 3.5X2.8X1.9 14001,7000.5 r90 top
LED223 "LED3" 3.5X2.8X1.9 14890,7000.5 r90 top
LED224 "LED3" 3.5X2.8X1.9 15779,7000.5 r90 top
LED225 "LED3" 3.5X2.8X1.9 9556,6111.5 r90 top
LED226 "LED3" 3.5X2.8X1.9 10445,6111.5 r90 top
LED227 "LED3" 3.5X2.8X1.9 11334,6111.5 r90 top
LED228 "LED3" 3.5X2.8X1.9 12223,6111.5 r90 top
LED229 "LED3" 3.5X2.8X1.9 13112,6111.5 r90 top
LED230 "LED3" 3.5X2.8X1.9 14001,6111.5 r90 top
LED231 "LED3" 3.5X2.8X1.9 14890,6111.5 r90 top
LED232 "LED3" 3.5X2.8X1.9 15779,6111.5 r90 top
LED233 "LED3" 3.5X2.8X1.9 9556,5222.5 r90 top
LED234 "LED3" 3.5X2.8X1.9 10445,5222.5 r90 top
LED235 "LED3" 3.5X2.8X1.9 11334,5222.5 r90 top
LED236 "LED3" 3.5X2.8X1.9 12223,5222.5 r90 top
LED237 "LED3" 3.5X2.8X1.9 13112,5222.5 r90 top
LED238 "LED3" 3.5X2.8X1.9 14001,5222.5 r90 top
LED239 "LED3" 3.5X2.8X1.9 14890,5222.5 r90 top
LED240 "LED3" 3.5X2.8X1.9 15779,5222.5 r90 top
LED241 "LED3" 3.5X2.8X1.9 9556,4333.5 r90 top
LED242 "LED3" 3.5X2.8X1.9 10445,4333.5 r90 top
LED243 "LED3" 3.5X2.8X1.9 11334,4333.5 r90 top
LED244 "LED3" 3.5X2.8X1.9 12223,4333.5 r90 top
LED245 "LED3" 3.5X2.8X1.9 13112,4333.5 r90 top
LED246 "LED3" 3.5X2.8X1.9 14001,4333.5 r90 top
LED247 "LED3" 3.5X2.8X1.9 14890,4333.5 r90 top
LED248 "LED3" 3.5X2.8X1.9 15779,4333.5 r90 top
LED249 "LED3" 3.5X2.8X1.9 9556,3444 r90 top
LED250 "LED3" 3.5X2.8X1.9 10445,3444 r90 top
LED251 "LED3" 3.5X2.8X1.9 11334,3444 r90 top
LED252 "LED3" 3.5X2.8X1.9 12223,3444 r90 top
LED253 "LED3" 3.5X2.8X1.9 13112,3444 r90 top
LED254 "LED3" 3.5X2.8X1.9 14001,3444 r90 top
LED255 "LED3" 3.5X2.8X1.9 14890,3444 r90 top
LED256 "LED3" 3.5X2.8X1.9 15779,3444 r90 top
LED_01 "LED2" 3.2X1.6X1.1 9818.75,9310 r270 bottom
LED_02 "LED2" 3.2X1.6X1.1 8836.25,9310 r270 bottom
LED_03 "LED2" 3.2X1.6X1.1 8345,9310 r270 bottom
LED_04 "LED2" 3.2X1.6X1.1 10310,9310 r270 bottom
LED_05 "LED2" 3.2X1.6X1.1 9325,9310 r270 bottom
LED_06 "LED2" 3.2X1.6X1.1 9330,9725 r270 bottom
MAX1 "MAX7219EWG" WSO24_N 12680,13725 r180 bottom
MAX2 "MAX7219EWG" WSO24_N 5565,13725 r180 bottom
MAX3 "MAX7219EWG" WSO24_N 5565,6560 r180 bottom
MAX4 "MAX7219EWG" WSO24_N 12690,6620 r180 bottom
MINUTE "Header 2" "RightAngle Tactile Switch" 9045,3877.5 r270 bottom (schematic designator SW2)
P? "Header 6" HDR1X6 9940,10780 r180 bottom
Photo "Photo Sen" PIN2 9070,14465 r0 bottom
PowerIn "Header 2" "Power Terminals" 9100,8055 r0 bottom
Q1 "DS3231SN" W16-H2_N 9100,10880 r180 bottom
R1 "Res2" J1-0603 9820,9465 r180 bottom
R2 "Res2" J1-0603 8850,9465 r180 bottom
R3 "Res2" J1-0603 8350,9465 r180 bottom
R4 "Res2" J1-0603 10315,9465 r180 bottom
R5 "Res2" J1-0603 9355,9465 r180 bottom
R6 "Res2" J1-0603 9220,9760 r270 bottom
R7 "Res2" J1-0603 9060,10550 r90 bottom
R8 "Res2" J1-0603 8960,10550 r270 bottom
R9 "Res2" J1-0603 9170,10550 r90 bottom
R10 "Res2" J1-0603 8765,10090 r90 bottom
R11 "Res2" J1-0603 9070,4820 r270 bottom
R12 "Res2" J1-0603 9235,4810 r270 bottom
R13 "Res2" J1-0603 8865,4810 r270 bottom
Rset01 "Res2" J1-0603 12675,13305 r90 bottom
Rset02 "Res2" J1-0603 5565,13330 r90 bottom
Rset03 "Res2" J1-0603 5560,6160 r90 bottom
Rset04 "Res2" J1-0603 12685,6220 r90 bottom
S1 "SW-DPST" DPST-4 8485,10025 r0 bottom
U1 "ATmega328P-AU" 32A_N 9112,10112 r225 bottom
VR1 "5V" SOT223_N 9110,8715 r90 bottom
VR2 "5V" SOT223_N 8625,9350 r90 bottom
VR3 "5V" SOT223_N 8135,9350 r90 bottom
VR4 "5V" SOT223_N 10095,9350 r90 bottom
VR5 "5V" SOT223_N 9115,9350 r90 bottom

## Footprints (in the part's own frame and the unit in brackets; to place one, negate y for a bottom-side part, rotate by r counter-clockwise, add the part's x,y. Pads: shape width x height; smd on the part's side, far side on the other; paste and mask are expansions set on the pad)
1CA470WR [mm]
  rect 2.5x1.2 smd: 1(2.54,0) 2(-2.54,0)
  silkscreen extent -4.06,-3.05 4.06,3.05
3.2X1.6X1.1 [mm] "SMT LED; 2 Flat Leads"
  rect 1.5x1.5 smd: 1(-1.75,0) 2(1.75,0)
  silkscreen extent -2.9,-1.15 3.2,1.15
3.5X2.8X1.9 [mm] "SM LED; 2 C-Bend Leads; Body 3.5 x 2.8 x 1.9 mm, inc leads (LxWxH typ)"
  rect 1.5x2.6 smd: 1(-1.5,0) 2(1.5,0)
  silkscreen extent -2.65,-1.7 2.95,1.7
6-0805_N [mm] "Chip Resistor, Body 2.0x1.2mm, IPC Medium Density"
  rect 1.2x1.4 smd: 1(-0.9,0) 2(0.9,0)
  silkscreen extent 0,-0.6 0,0.6, body extent -1.07,-0.7 1.07,0.7, height 0.7
32A_N [mm] "Thin QFP, 32-Leads, Body 7x7mm, Pitch 0.8mm, IPC Medium Density"
  oval 1.65x0.55 smd: 1(-4.2,2.8) 2(-4.2,2) 3(-4.2,1.2) 4(-4.2,0.4) 5(-4.2,-0.4) 6(-4.2,-1.2) 7(-4.2,-2) 8(-4.2,-2.8) 17(4.2,-2.8) 18(4.2,-2) 19(4.2,-1.2) 20(4.2,-0.4) 21(4.2,0.4) 22(4.2,1.2) 23(4.2,2) 24(4.2,2.8)
  oval 0.55x1.65 smd: 9(-2.8,-4.2) 10(-2,-4.2) 11(-1.2,-4.2) 12(-0.4,-4.2) 13(0.4,-4.2) 14(1.2,-4.2) 15(2,-4.2) 16(2.8,-4.2) 25(2.8,4.2) 26(2,4.2) 27(1.2,4.2) 28(0.4,4.2) 29(-0.4,4.2) 30(-1.2,4.2) 31(-2,4.2) 32(-2.8,4.2)
  silkscreen extent -4.32,-2.95 2.95,3.75, body extent -3.5,-3.5 3.5,3.5, height 1.2
"C2032 Battery Holder" [mil]
  rect 102x142 smd: 1(-577,0) 2(577,0)
  Keep-Out Layer region: -216,138 216,138 216,-138 -216,-138
  silkscreen extent -710,-394 394,394
"Crystal Oscillator" [mil]
  rect 60x90 smd: 0(-215,0) 0(210,0)
  round 60 hole 30: 1(-100,0) 2(100,0)
  silkscreen extent -212,-105 207,105
DPST-4 [mm] "Switch; 4 Leads"
  rect 1.85x1.85 hole 1.1: 1(-2.54,1.27)
  round 1.85 hole 1.1: 2(-2.54,-1.27) 3(2.54,-1.27) 4(2.54,1.27)
  silkscreen extent -4.88,-2.54 4.28,2.54
HDR1X6 [mm] "Connector; Header; 6 Position"
  rect 1.5x1.5 hole 0.9: 1(0,0)
  round 1.5 hole 0.9: 2(2.54,0) 3(5.08,0) 4(7.62,0) 5(10.16,0) 6(12.7,0)
  silkscreen extent -1.27,-1.27 13.97,1.27
HDR2X3 [mm] "Connector; Header; 3x2 Position"
  rect 1.5x1.5 hole 0.9: 1(0,0)
  round 1.5 hole 0.9: 2(0,2.54) 3(2.54,0) 4(2.54,2.54) 5(5.08,0) 6(5.08,2.54)
  silkscreen extent -1.27,-1.27 6.35,3.81
J1-0603 [mm] "Chip Resistor; Body 1.6 x 0.8 mm (LxW typ)"
  rect 1.1x1 smd: 1(-0.85,0) 2(0.85,0)
PIN2 [mm] "Photosensitive Diode; 2 Leads"
  rect 1.5x1.5 hole 0.9: 1(0,0)
  round 1.5 hole 0.9: 2(2.54,0)
  silkscreen extent -1.4,-1.4 3.94,2.17
"Power Terminals" [mil]
  rect 250x300 smd: 1(-205,-5) 2(205,-5)
  silkscreen extent -550,-200 375,200
"RightAngle Tactile Switch" [mil]
  round 85 hole 55: 0(-138,49) 0(138,49)
  round 65 hole 42: 1(-88.5,-49) 2(88.5,-49)
  silkscreen extent -205,-115 205,125
SMC [mm] "DO-214-AB/SMC; 2 C-Bend Leads; Body 7.9 x 5.9 mm, inc. leads (LxW)"
  rect 2.4x3.3 smd: 1(-3.475,0) 2(3.475,0)
  silkscreen extent -5.07,-2.05 5.43,2.05
SOT223_N [mm] "SOT223, 4-Leads, Body 6.5x3.5mm, Pitch 2.3mm, Lead Span 7mm, IPC Medium Density"
  rect 2.4x1 smd: 1(-2.9,2.3) 2(-2.9,0) 3(-2.9,-2.3)
  rect 2.4x3.3 smd: 4(2.9,0)
  silkscreen extent -3.02,-3.35 1.4,3.48, body extent -1.85,-3.35 1.85,3.35, height 1.7
W16-H2_N [mm] "SOIC, 16-Leads, Body 10.3x7.5mm, Pitch 1.27mm, IPC Medium Density"
  oval 2.3x0.6 smd: 1(-4.55,4.445) 2(-4.55,3.175) 3(-4.55,1.905) 4(-4.55,0.635) 5(-4.55,-0.635) 6(-4.55,-1.905) 7(-4.55,-3.175) 8(-4.55,-4.445) 9(4.55,-4.445) 10(4.55,-3.175) 11(4.55,-1.905) 12(4.55,-0.635) 13(4.55,0.635) 14(4.55,1.905) 15(4.55,3.175) 16(4.55,4.445)
  silkscreen extent -4.67,-5.25 3,5.42, body extent -3.8,-5.25 3.8,5.25, height 2.65
WSO24_N [mm] "SOIC, 24-Leads, Body 15.4x7.5mm, Pitch 1.27mm, IPC Medium Density"
  oval 2.3x0.6 smd: 1(-4.55,6.985) 2(-4.55,5.715) 3(-4.55,4.445) 4(-4.55,3.175) 5(-4.55,1.905) 6(-4.55,0.635) 7(-4.55,-0.635) 8(-4.55,-1.905) 9(-4.55,-3.175) 10(-4.55,-4.445) 11(-4.55,-5.715) 12(-4.55,-6.985) 13(4.55,-6.985) 14(4.55,-5.715) 15(4.55,-4.445) 16(4.55,-3.175) 17(4.55,-1.905) 18(4.55,-0.635) 19(4.55,0.635) 20(4.55,1.905) 21(4.55,3.175) 22(4.55,4.445) 23(4.55,5.715) 24(4.55,6.985)
  silkscreen extent -4.67,-7.95 3,7.96, body extent -3.8,-7.8 3.8,7.8, height 2.65

## Part data
ALT HOUR MINUTE PowerIn: "Header, 2-Pin"
C1 C2 C3 C4 C5 C6 C7 C8 C9 C10 C11 C12 C13 C14 C15 C16 C17 C18 C19 C20: "Capacitor (Semiconductor SIM Model)"
Cp1 Cp2 Cp3 Cp4 Cp5 Cp6: "Polarized Capacitor (Surface Mount)"
D1: "Default Diode"
J1: library part "Header 3X2", "Header, 3-Pin, Dual row"
JP2: library part "Header 6", "Header, 6-Pin"
LED1 LED2 LED3 LED4 LED5 LED6 LED7 LED8 LED9 LED10 LED11 LED12 LED13 LED14 LED15 LED16 LED17 LED18 LED19 LED20 LED21 LED22 LED23 LED24 LED25 LED26 LED27 LED28 LED29 LED30 LED31 LED32 LED33 LED34 LED35 LED36 LED37 LED38 LED39 LED40 LED41 LED42 LED43 LED44 LED45 LED46 LED47 LED48 LED49 LED50 LED51 LED52 LED53 LED54 LED55 LED56 LED57 LED58 LED59 LED60 LED61 LED62 LED63 LED64 LED65 LED66 LED67 LED68 LED69 LED70 LED71 LED72 LED73 LED74 LED75 LED76 LED77 LED78 LED79 LED80 LED81 LED82 LED83 LED84 LED85 LED86 LED87 LED88 LED89 LED90 LED91 LED92 LED93 LED94 LED95 LED96 LED97 LED98 LED99 LED100 LED101 LED102 LED103 LED104 LED105 LED106 LED107 LED108 LED109 LED110 LED111 LED112 LED113 LED114 LED115 LED116 LED117 LED118 LED119 LED120 LED121 LED122 LED123 LED124 LED125 LED126 LED127 LED128 LED129 LED130 LED131 LED132 LED133 LED134 LED135 LED136 LED137 LED138 LED139 LED140 LED141 LED142 LED143 LED144 LED145 LED146 LED147 LED148 LED149 LED150 LED151 LED152 LED153 LED154 LED155 LED156 LED157 LED158 LED159 LED160 LED161 LED162 LED163 LED164 LED165 LED166 LED167 LED168 LED169 LED170 LED171 LED172 LED173 LED174 LED175 LED176 LED177 LED178 LED179 LED180 LED181 LED182 LED183 LED184 LED185 LED186 LED187 LED188 LED189 LED190 LED191 LED192 LED193 LED194 LED195 LED196 LED197 LED198 LED199 LED200 LED201 LED202 LED203 LED204 LED205 LED206 LED207 LED208 LED209 LED210 LED211 LED212 LED213 LED214 LED215 LED216 LED217 LED218 LED219 LED220 LED221 LED222 LED223 LED224 LED225 LED226 LED227 LED228 LED229 LED230 LED231 LED232 LED233 LED234 LED235 LED236 LED237 LED238 LED239 LED240 LED241 LED242 LED243 LED244 LED245 LED246 LED247 LED248 LED249 LED250 LED251 LED252 LED253 LED254 LED255 LED256: "Typical BLUE SiC LED"
LED_01 LED_02 LED_03 LED_04 LED_05 LED_06: "Typical RED, GREEN, YELLOW, AMBER GaAs LED"
MAX1 MAX2 MAX3 MAX4: "Serially Interfaced, 8-Digit LED Display Driver"
P?: "Header, 6-Pin"
Photo: "Photosensitive Diode"
R1 R2 R3 R4 R5 R6 R7 R8 R9 R10 R11 R12 R13 Rset01 Rset02 Rset03 Rset04: "Resistor"
S1: "Double-Pole, Single-Throw Switch"
U1: "8-bit AVR Microcontroller, 32KB Flash, 1KB EEPROM, 2KB SRAM, 32-pin TQFP, Industrial Grade (-40°C to 85°C)"
VR1 VR2 VR3 VR4 VR5: library part "Volt Reg", "Voltage Regulator"

## Free pads (board coordinates)
  round 122.05 hole 122.05 unplated: 0(2165,3165) 0(2165,17060) 0(9540,11150) 0(15825,3165) 0(16060,17060)

## Via types
v1: diameter 30, hole 15, Top Layer to Bottom Layer, 442 vias
v2: diameter 30, hole 28, Top Layer to Bottom Layer, 2 vias
v3: diameter 50, hole 28, Top Layer to Bottom Layer, 1 vias

## Nets (pads, with @x,y where several pads share a name; then routed paths per layer and width w, separated by ;. In a path a pad name is that pad's centre, name@x,y a point inside that pad or via, vN(x,y) a via of type N, cw(c..) or ccw(c..) an arc to the next point about the centre after c; other vN are vias at no path point)
CLK: MAX1.13 MAX2.13 MAX3.13 MAX4.13 U1.25 | length 22303.8
  Top Layer w15: v1(5490,6470) v1(5490,6630) ; v1(5490,9950) 5530,9990 7860,9990 7900,9950 8105,9950 8335,10180 8825,10180 v1(8830,10185) 9522.82,10185 9550.32,10212.5 9642.5,10212.5 9820,10390 12555,10390 v1(12600,10345) ; v1(12600,6535) v1(12600,6700)
  Bottom Layer w15: MAX3.13@5385.87,6285 5465,6285 5490,6310 v1(5490,6470) ; MAX2.13@5385.87,13450 5295,13450 5250,13405 5250,13340 5490,13100 v1(5490,9950) v1(5490,6630) ; v1(8830,10185) 8883.1,10185 U1.25@8917.13,10150.97 ; MAX1.13@12500.87,13450 12420,13450 12365,13395 12365,13350 12600,13115 v1(12600,10345) v1(12600,6700) ; MAX4.13@12510.87,6345 12600,6345 v1(12600,6535)
DIG0: LED1.2 LED9.2 LED17.2 LED25.2 LED33.2 LED41.2 LED49.2 LED57.2 MAX1.2 | length 40414.5
  Top Layer w15: LED1.2@9554,16843.56 9554,16899 9685,17030 13510,17030 13565,16975 v1(13565,16830) ; LED57.2@9559,10620.56 10325.56,10620.56 10652.5,10947.5 13542.5,10947.5 v1(13565,10970) ; LED49.2@9559,11505.56 9559,11564 9827.5,11832.5 13542.5,11832.5 v1(13565,11855) ; LED41.2@9559,12395.56 9559,12454 9830,12725 13545,12725 v1(13565,12745) ; LED33.2@9559,13285.56 9559,13344 9827.5,13612.5 v1(13567.5,13612.5) ; LED25.2@9559,14173.56 9559,14229 9690,14360 13515,14360 13565,14310 v1(13565,14160) ; LED17.2@9559,15063.56 9559,15119 9690,15250 13515,15250 13565,15200 v1(13565,15050) ; LED9.2@9559,15953.56 9559,16009 9690,16140 13515,16140 13565,16090 v1(13565,15940) ; v1(13040,13950) v1(13570,13950)
  Bottom Layer w15: MAX1.2@12859.13,13950 v1(13040,13950) ; v1(13565,10970) v1(13565,11855) v1(13565,12745) 13567.5,12747.5 v1(13567.5,13612.5) 13567.5,14157.5 v1(13565,14160) v1(13565,15050) v1(13565,15940) v1@13565,16825
DIG0A: LED65.2 LED73.2 LED81.2 LED89.2 LED97.2 LED105.2 LED113.2 LED121.2 MAX2.2 | length 40451.5
  Top Layer w15: LED121.2@2444,10615.56 2444,10674 2712.5,10942.5 6427.5,10942.5 v1(6450,10965) ; LED113.2@2444,11510.56 2444,11569 2712.5,11837.5 6427.5,11837.5 v1(6450,11860) ; LED105.2@2444,12395.56 2444,12454 2712.5,12722.5 6427.5,12722.5 v1(6450,12745) ; LED97.2@2444,13285.56 2444,13344 2712.5,13612.5 6427.5,13612.5 v1(6450,13635) ; LED89.2@2444,14173.56 2444,14229 2575,14360 6400,14360 6450,14310 v1(6450,14160) ; LED81.2@2444,15063.56 2444,15119 2575,15250 6400,15250 6450,15200 v1(6450,15050) ; LED73.2@2444,15953.56 2444,16009 2575,16140 6400,16140 6450,16090 v1(6450,15940) ; LED65.2@2444,16838.56 2444,16894 2575,17025 6400,17025 6450,16975 v1(6450,16825) ; v1(6000,13950) v1(6450,13950)
  Bottom Layer w15: MAX2.2@5744.13,13950 v1(6000,13950) ; v1(6450,10965) v1(6450,11860) v1(6450,12745) v1(6450,13635) v1(6450,13950) v1(6450,14160) v1(6450,15050) v1(6450,15940) v1(6450,16825)
DIG0B: LED129.2 LED137.2 LED145.2 LED153.2 LED161.2 LED169.2 LED177.2 LED185.2 MAX3.2 | length 40195.5
  Top Layer w15: LED185.2@2444,3505.56 2444,3564 2712.5,3832.5 6427.5,3832.5 v1(6450,3855) ; LED177.2@2444,4395.56 2444,4454 2712.5,4722.5 6427.5,4722.5 v1(6450,4745) ; LED169.2@2444,5285.56 2444,5344 2712.5,5612.5 6427.5,5612.5 v1(6450,5635) ; LED161.2@2444,6170.56 2444,6229 2617.5,6402.5 5288.46,6402.5 5300.96,6415 5795,6415 5830,6450 5830,6645 v1(5970,6785) v1(6450,6785) ; LED153.2@2444,7063.56 2444,7119 2575,7250 6400,7250 6450,7200 v1(6450,7050) ; LED145.2@2444,7953.56 2444,8009 2575,8140 6400,8140 6450,8090 v1(6450,7940) ; LED137.2@2444,8843.56 2444,8899 2575,9030 6400,9030 6450,8980 v1(6450,8830) ; LED129.2@2444,9728.56 2444,9784 2575,9915 6400,9915 6450,9865 v1(6450,9715)
  Bottom Layer w15: MAX3.2@5744.13,6785 v1(5970,6785) ; v1(6450,3855) v1(6450,4745) v1(6450,5635) v1(6450,6785) v1(6450,7050) v1(6450,7940) v1(6450,8830) v1(6450,9715)
DIG0C: LED193.2 LED201.2 LED209.2 LED217.2 LED225.2 LED233.2 LED241.2 LED249.2 MAX4.2 | length 40054.9
  Top Layer w15: LED225.2@9556,6170.56 9556,6294 9732,6470 12650,6470 12715,6535 v1(12715,6775) ; LED249.2@9559,3505.56 9559,3564 9827.5,3832.5 13542.5,3832.5 v1(13565,3855) ; LED241.2@9559,4395.56 9559,4454 9827.5,4722.5 13542.5,4722.5 v1(13565,4745) ; LED233.2@9559,5285.56 9559,5344 9827.5,5612.5 13542.5,5612.5 v1(13565,5635) ; LED217.2@9559,7058.56 9559,7114 9690,7245 13515,7245 13565,7195 v1(13565,7045) ; LED209.2@9559,7953.56 9559,8009 9690,8140 13515,8140 13565,8090 v1(13565,7940) ; LED201.2@9559,8843.56 9559,8899 9690,9030 13515,9030 13565,8980 v1(13565,8830) ; LED193.2@9559,9733.56 9746.06,9733.56 9815,9802.5 10412.5,9802.5 10530,9920 13515,9920 13565,9870 v1(13565,9720) ; v1(13100,6845) v1(13565,6845)
  Bottom Layer w15: v1(12715,6775) 12715,6810 12750,6845 MAX4.2@12869.13,6845 v1(13100,6845) ; v1(13565,3855) v1(13565,4745) v1(13565,5635) v1(13565,6845) v1(13565,7045) v1(13565,7940) v1(13565,8830) v1(13565,9720)
DIG1: LED2.2 LED10.2 LED18.2 LED26.2 LED34.2 LED42.2 LED50.2 LED58.2 MAX1.11 | length 32002.3
  Top Layer w15: LED2.2@10443,16843.56 10443,16898 10550,17005 13435,17005 13485,16955 v1(13485,16830) ; LED58.2@10448,10620.56 10448,10672 10663.5,10887.5 13462.5,10887.5 v1(13490,10915) ; LED50.2@10448,11505.56 10448,11557 10663.5,11772.5 13462.5,11772.5 v1(13490,11800) ; LED42.2@10448,12395.56 10448,12447 10666,12665 13465,12665 v1(13490,12690) ; LED34.2@10448,13285.56 10448,13337 10663.5,13552.5 13482.5,13552.5 v1(13485,13550) ; LED26.2@10448,14173.56 10448,14228 10555,14335 13440,14335 13485,14290 v1(13485,14160) ; LED18.2@10448,15063.56 10448,15118 10555,15225 13440,15225 13485,15180 v1(13485,15050) ; LED10.2@10448,15953.56 10448,16008 10555,16115 13440,16115 13485,16070 v1(13485,15940)
  Bottom Layer w15: MAX1.11@12859.13,13500 12980,13500 v1(13030,13550) ; v1@13485,10920 v1(13485,16830)
DIG1A: LED66.2 LED74.2 LED82.2 LED90.2 LED98.2 LED106.2 LED114.2 LED122.2 MAX2.11 | length 32027.4
  Top Layer w15: LED122.2@3333,10615.56 3333,10667 3548.5,10882.5 6347.5,10882.5 v1(6375,10910) ; LED114.2@3333,11510.56 3333,11562 3548.5,11777.5 6347.5,11777.5 v1(6375,11805) ; LED106.2@3333,12395.56 3333,12447 3548.5,12662.5 6347.5,12662.5 v1(6375,12690) ; LED98.2@3333,13285.56 3333,13337 3548.5,13552.5 v1(5912.5,13552.5) 6347.5,13552.5 v1(6375,13580) ; LED90.2@3333,14173.56 3333,14228 3440,14335 6325,14335 6375,14285 v1(6375,14160) ; LED82.2@3333,15063.56 3333,15118 3440,15225 6325,15225 6375,15175 v1(6375,15050) ; LED74.2@3333,15953.56 3333,16008 3440,16115 6325,16115 6375,16065 v1(6375,15940) ; LED66.2@3333,16838.56 3333,16893 3440,17000 6325,17000 6375,16950 v1(6375,16825)
  Bottom Layer w15: MAX2.11@5744.13,13500 5860,13500 v1(5912.5,13552.5) ; v1(6375,10910) v1(6375,14160) v1(6375,15050) v1(6375,15940) v1(6375,16825)
DIG1B: LED130.2 LED138.2 LED146.2 LED154.2 LED162.2 LED170.2 LED178.2 LED186.2 MAX3.11 | length 31804.8
  Top Layer w15: LED186.2@3333,3505.56 3333,3557 3548.5,3772.5 6347.5,3772.5 v1(6375,3800) ; LED178.2@3333,4395.56 3333,4447 3548.5,4662.5 6347.5,4662.5 v1(6375,4690) ; LED170.2@3333,5285.56 3333,5337 3548.5,5552.5 6347.5,5552.5 v1(6375,5580) ; LED162.2@3333,6170.56 3333,6223 3470,6360 v1(5675,6360) ; LED154.2@3333,7063.56 3333,7118 3440,7225 6325,7225 6375,7175 v1(6375,7050) ; LED146.2@3333,7953.56 3333,8008 3440,8115 6325,8115 6375,8065 v1(6375,7940) ; LED138.2@3333,8843.56 3333,8898 3440,9005 6325,9005 6375,8955 v1(6375,8830) ; LED130.2@3333,9728.56 3333,9783 3440,9890 6325,9890 6375,9840 v1(6375,9715) ; v1(5975,6335) v1(6375,6335)
  Bottom Layer w15: v1(5675,6360) 5700,6335 MAX3.11@5744.13,6335 v1(5975,6335) ; v1(6375,3800) v1(6375,4690) v1(6375,5580) v1(6375,6335) v1(6375,7050) v1(6375,7940) v1(6375,8830) v1(6375,9715)
DIG1C: LED194.2 LED202.2 LED210.2 LED218.2 LED226.2 LED234.2 LED242.2 LED250.2 MAX4.11 | length 31885.6
  Top Layer w15: LED226.2@10445,6170.56 10445,6305 10560,6420 12760,6420 12775,6405 v1(12785,6405) ; LED250.2@10448,3505.56 10448,3557 10663.5,3772.5 13462.5,3772.5 v1(13490,3800) ; LED242.2@10448,4395.56 10448,4447 10663.5,4662.5 13462.5,4662.5 v1(13490,4690) ; LED234.2@10448,5285.56 10448,5337 10663.5,5552.5 13462.5,5552.5 v1(13490,5580) ; LED218.2@10448,7058.56 10448,7113 10555,7220 13440,7220 13490,7170 v1(13490,7045) ; LED210.2@10448,7953.56 10448,8008 10555,8115 13440,8115 13490,8065 v1(13490,7940) ; LED202.2@10448,8843.56 10448,8898 10555,9005 13440,9005 13490,8955 v1(13490,8830) ; LED194.2@10448,9733.56 10448,9788 10555,9895 13440,9895 13490,9845 v1(13490,9720) ; v1(13100,6395) v1(13490,6395)
  Bottom Layer w15: v1(12785,6405) 12795,6405 12805,6395 MAX4.11@12869.13,6395 v1(13100,6395) ; v1(13490,3800) v1(13490,4690) v1(13490,5580) v1(13490,6395) v1(13490,7045) v1(13490,7940) v1(13490,8830) v1(13490,9720)
DIG2: LED3.2 LED11.2 LED19.2 LED27.2 LED35.2 LED43.2 LED51.2 LED59.2 MAX1.6 | length 24484.6
  Top Layer w15: LED3.2@11332,16843.56 11332,16897 11415,16980 13355,16980 13410,16925 v1(13410,16830) ; LED59.2@11337,10620.56 11337,10672 11495,10830 13390,10830 v1(13415,10855) ; LED51.2@11337,11505.56 11337,11557 11495,11715 13390,11715 v1(13415,11740) ; LED43.2@11337,12395.56 11337,12447 11497.5,12607.5 13392.5,12607.5 v1(13415,12630) ; LED35.2@11337,13285.56 11337,13337 11495,13495 13390,13495 v1(13415,13520) ; LED27.2@11337,14173.56 11337,14227 11420,14310 13360,14310 13410,14260 v1(13410,14160) ; LED19.2@11337,15063.56 11337,15117 11420,15200 13360,15200 13410,15150 v1(13410,15050) ; LED11.2@11337,15953.56 11337,16007 11420,16090 13360,16090 13410,16040 v1(13410,15940) ; v1(13040,13785) v1(13410,13785)
  Bottom Layer w15: MAX1.6@12859.13,13750 12970,13750 13005,13785 v1(13040,13785) ; v1@13410,10860 v1(13410,13785) v1(13410,16830)
DIG2A: LED67.2 LED75.2 LED83.2 LED91.2 LED99.2 LED107.2 LED115.2 LED123.2 MAX2.6 | length 24507
  Top Layer w15: LED123.2@4222,10615.56 4222,10667 4380,10825 6275,10825 v1(6300,10850) ; LED115.2@4222,11510.56 4222,11562 4380,11720 6275,11720 v1(6300,11745) ; LED107.2@4222,12395.56 4222,12447 4380,12605 6275,12605 v1(6300,12630) ; LED99.2@4222,13285.56 4222,13337 4380,13495 6275,13495 v1(6300,13520) ; LED91.2@4222,14173.56 4222,14227 4305,14310 6245,14310 6300,14255 v1(6300,14160) ; LED83.2@4222,15063.56 4222,15117 4305,15200 6245,15200 6300,15145 v1(6300,15050) ; LED75.2@4222,15953.56 4222,16007 4305,16090 6245,16090 6300,16035 v1(6300,15940) ; LED67.2@4222,16838.56 4222,16892 4305,16975 6245,16975 6300,16920 v1(6300,16825) ; v1(5920,13800) v1(6300,13800)
  Bottom Layer w15: MAX2.6@5744.13,13750 5850,13750 5900,13800 v1(5920,13800) ; v1(6300,10850) v1(6300,11745) v1(6300,12630) v1(6300,13520) v1(6300,13800) v1(6300,14160) v1(6300,15050) v1(6300,15940) v1(6300,16825)
DIG2B: LED131.2 LED139.2 LED147.2 LED155.2 LED163.2 LED171.2 LED179.2 LED187.2 MAX3.6 | length 24312
  Top Layer w15: LED187.2@4222,3505.56 4222,3557 4380,3715 6275,3715 v1(6300,3740) ; LED179.2@4222,4395.56 4222,4447 4380,4605 6275,4605 v1(6300,4630) ; LED171.2@4222,5285.56 4222,5337 4380,5495 6275,5495 v1(6300,5520) ; LED163.2@4222,6170.56 4222,6227 4310,6315 5830,6315 5875,6360 5875,6485 v1(5975,6585) v1(6300,6585) ; LED155.2@4222,7063.56 4222,7117 4305,7200 6245,7200 6300,7145 v1(6300,7050) ; LED147.2@4222,7953.56 4222,8007 4305,8090 6245,8090 6300,8035 v1(6300,7940) ; LED139.2@4222,8843.56 4222,8897 4305,8980 6245,8980 6300,8925 v1(6300,8830) ; LED131.2@4222,9728.56 4222,9782 4305,9865 6245,9865 6300,9810 v1(6300,9715)
  Bottom Layer w15: MAX3.6@5744.13,6585 v1(5975,6585) ; v1(6300,3740) v1(6300,4630) v1(6300,5520) v1(6300,6585) v1(6300,7050) v1(6300,7940) v1(6300,8830) v1(6300,9715)
DIG2C: LED195.2 LED203.2 LED211.2 LED219.2 LED227.2 LED235.2 LED243.2 LED251.2 MAX4.6 | length 24340.6
  Top Layer w15: LED227.2@11334,6170.56 11334,6279 11425,6370 12965,6370 12995,6400 v1(12995,6645) ; LED251.2@11337,3505.56 11337,3557 11495,3715 13390,3715 v1(13415,3740) ; LED243.2@11337,4395.56 11337,4447 11495,4605 13390,4605 v1(13415,4630) ; LED235.2@11337,5285.56 11337,5337 11495,5495 13390,5495 v1(13415,5520) ; LED219.2@11337,7058.56 11337,7112 11420,7195 13360,7195 13415,7140 v1(13415,7045) ; LED211.2@11337,7953.56 11337,8007 11420,8090 13360,8090 13415,8035 v1(13415,7940) ; LED203.2@11337,8843.56 11337,8897 11420,8980 13360,8980 13415,8925 v1(13415,8830) ; LED195.2@11337,9733.56 11337,9787 11420,9870 13360,9870 13415,9815 v1(13415,9720) ; v1(13100,6645) v1(13415,6645)
  Bottom Layer w15: MAX4.6@12869.13,6645 v1(12995,6645) v1(13100,6645) ; v1(13415,3740) v1(13415,4630) v1(13415,5520) v1(13415,6645) v1(13415,7045) v1(13415,7940) v1(13415,8830) v1(13415,9720)
DIG3: LED4.2 LED12.2 LED20.2 LED28.2 LED36.2 LED44.2 LED52.2 LED60.2 MAX1.7 | length 16581.6
  Top Layer w15: LED4.2@12221,16843.56 12221,16899 12277,16955 13285,16955 13340,16900 v1(13340,16830) ; LED60.2@12226,10620.56 12226,10674 12309.5,10757.5 13317.5,10757.5 13345,10785 v1(13345,10790) ; LED52.2@12226,11505.56 12226,11559 12309.5,11642.5 13317.5,11642.5 13345,11670 v1(13345,11675) ; LED44.2@12226,12395.56 12226,12449 12312,12535 13320,12535 13345,12560 v1(13345,12565) ; LED36.2@12226,13285.56 12226,13339 12309.5,13422.5 13317.5,13422.5 13345,13450 v1(13345,13455) ; LED28.2@12226,14173.56 12226,14229 12282,14285 13290,14285 13340,14235 v1(13340,14160) ; LED20.2@12226,15063.56 12226,15119 12282,15175 13290,15175 13340,15125 v1(13340,15050) ; LED12.2@12226,15953.56 12226,16009 12282,16065 13290,16065 13340,16015 v1(13340,15940) ; v1(13040,13740) v1(13340,13740)
  Bottom Layer w15: MAX1.7@12859.13,13700 12970,13700 13010,13740 v1(13040,13740) ; v1@13340,10795 v1(13340,13740) v1(13340,16830)
DIG3A: LED68.2 LED76.2 LED84.2 LED92.2 LED100.2 LED108.2 LED116.2 LED124.2 MAX2.7 | length 16602
  Top Layer w15: LED124.2@5111,10615.56 5111,10669 5194.5,10752.5 6202.5,10752.5 6230,10780 v1(6230,10785) ; LED116.2@5111,11510.56 5111,11564 5194.5,11647.5 6202.5,11647.5 6230,11675 v1(6230,11680) ; LED108.2@5111,12395.56 5111,12449 5194.5,12532.5 6202.5,12532.5 6230,12560 v1(6230,12565) ; LED100.2@5111,13285.56 5111,13339 5194.5,13422.5 6202.5,13422.5 6230,13450 v1(6230,13455) ; LED92.2@5111,14173.56 5111,14229 5167,14285 6175,14285 6230,14230 v1(6230,14160) ; LED84.2@5111,15063.56 5111,15119 5167,15175 6175,15175 6230,15120 v1(6230,15050) ; LED76.2@5111,15953.56 5111,16009 5167,16065 6175,16065 6230,16010 v1(6230,15940) ; LED68.2@5111,16838.56 5111,16894 5167,16950 6175,16950 6230,16895 v1(6230,16825) ; v1(5920,13750) v1(6230,13750)
  Bottom Layer w15: MAX2.7@5744.13,13700 5850,13700 5900,13750 v1(5920,13750) ; v1(6230,10785) v1(6230,11680) v1(6230,12565) v1(6230,13455) v1(6230,13750) v1(6230,14160) v1(6230,15050) v1(6230,15940) v1(6230,16825)
DIG3B: LED132.2 LED140.2 LED148.2 LED156.2 LED164.2 LED172.2 LED180.2 LED188.2 MAX3.7 | length 16566.6
  Top Layer w15: LED188.2@5111,3503.06 5111,3559 ; LED188.2@5111,3505.56 5111,3559 ; LED180.2@5111,4395.56 5111,4449 5194.5,4532.5 6202.5,4532.5 6230,4560 v1(6230,4565) ; LED172.2@5111,5285.56 5111,5339 5194.5,5422.5 6202.5,5422.5 6230,5450 v1(6230,5455) ; LED164.2@5111,6170.56 5111,6221 5140,6250 5875,6250 5920,6295 5920,6480 v1(5975,6535) v1(6230,6535) ; LED156.2@5111,7063.56 5111,7119 5167,7175 6175,7175 6230,7120 v1(6230,7050) ; LED148.2@5111,7953.56 5111,8009 5167,8065 6175,8065 6230,8010 v1(6230,7940) ; LED140.2@5111,8843.56 5111,8899 5167,8955 6175,8955 6230,8900 v1(6230,8830) ; LED132.2@5111,9728.56 5111,9784 5167,9840 6175,9840 6230,9785 v1(6230,9715) ; v1(6230,3675) 6230,3670 6202.5,3642.5 5194.5,3642.5 5111,3559
  Bottom Layer w15: MAX3.7@5744.13,6535 v1(5975,6535) ; v1(6230,3675) v1(6230,4565) v1(6230,5455) v1(6230,6535) v1(6230,7050) v1(6230,7940) v1(6230,8830) v1(6230,9715)
DIG3C: LED196.2 LED204.2 LED212.2 LED220.2 LED228.2 LED236.2 LED244.2 LED252.2 MAX4.7 | length 16648.1
  Top Layer w15: LED228.2@12223,6170.56 12223,6248 12275,6300 12985,6300 13045,6360 v1(13045,6595) ; LED252.2@12226,3503.06 12226,3559 ; LED252.2@12226,3505.56 12226,3559 ; LED244.2@12226,4393.06 12226,4449 12309.5,4532.5 13317.5,4532.5 13345,4560 v1(13345,4565) ; LED236.2@12226,5283.06 12226,5339 ; LED236.2@12226,5285.56 12226,5339 ; LED220.2@12226,7058.56 12226,7114 12282,7170 13290,7170 13345,7115 v1(13345,7045) ; LED212.2@12226,7953.56 12226,8009 12282,8065 13290,8065 13345,8010 v1(13345,7940) ; LED204.2@12226,8843.56 12226,8899 12282,8955 13290,8955 13345,8900 v1(13345,8830) ; LED196.2@12226,9733.56 12226,9789 12282,9845 13290,9845 13345,9790 v1(13345,9720) ; v1(13100,6595) v1(13345,6595) ; v1(13345,3675) 13345,3670 13317.5,3642.5 12309.5,3642.5 12226,3559 ; v1(13345,5455) 13345,5450 13317.5,5422.5 12309.5,5422.5 12226,5339
  Bottom Layer w15: MAX4.7@12869.13,6595 v1(13045,6595) v1(13100,6595) ; v1(13345,3675) v1(13345,4565) v1(13345,5455) v1(13345,6595) v1(13345,7045) v1(13345,7940) v1(13345,8830) v1(13345,9720)
DIG4: LED5.2 LED13.2 LED21.2 LED29.2 LED37.2 LED45.2 LED53.2 LED61.2 MAX1.3 | length 8566.9
  Top Layer w15: LED5.2@13110,16843.56 13110,16900 13140,16930 13210,16930 13260,16880 v1(13260,16830) ; LED61.2@13115,10620.56 13115,10675 13165,10725 v1(13265,10725) ; LED53.2@13115,11505.56 13115,11560 13165,11610 v1(13265,11610) ; LED45.2@13115,12395.56 13115,12450 13167.5,12502.5 13262.5,12502.5 v1(13265,12500) ; LED37.2@13115,13285.56 13115,13340 13165,13390 v1(13265,13390) ; LED29.2@13115,14173.56 13115,14230 13145,14260 13215,14260 13265,14210 v1(13265,14160) ; LED21.2@13115,15063.56 13115,15120 13145,15150 13215,15150 13265,15100 v1(13265,15050) ; LED13.2@13115,15953.56 13115,16010 13145,16040 13215,16040 13265,15990 v1(13265,15940)
  Bottom Layer w15: MAX1.3@12859.13,13900 13265,13900 ; v1(13265,10725) v1(13265,11610) v1(13265,12500) v1(13265,13390) 13265,13900 ; v1@13265,16825 v1(13265,15940) v1(13265,15050) v1(13265,14160) 13265,13900
DIG4A: LED69.2 LED77.2 LED85.2 LED93.2 LED101.2 LED109.2 LED117.2 LED125.2 MAX2.3 | length 8576
  Top Layer w15: LED125.2@6000,10615.56 6000,10670 6050,10720 v1(6150,10720) ; LED117.2@6000,11510.56 6000,11565 6050,11615 v1(6150,11615) ; LED109.2@6000,12395.56 6000,12450 6050,12500 v1(6150,12500) ; LED101.2@6000,13285.56 6000,13340 6050,13390 v1(6150,13390) ; LED93.2@6000,14173.56 6000,14230 6030,14260 6100,14260 6150,14210 v1(6150,14160) ; LED85.2@6000,15063.56 6000,15120 6030,15150 6100,15150 6150,15100 v1(6150,15050) ; LED77.2@6000,15953.56 6000,16010 6030,16040 6100,16040 6150,15990 v1(6150,15940) ; LED69.2@6000,16838.56 6000,16895 6030,16925 6100,16925 6150,16875 v1(6150,16825)
  Bottom Layer w15: MAX2.3@5744.13,13900 5845.6,13900 5860.6,13915 6150,13915 ; v1(6150,10720) v1(6150,11615) v1(6150,12500) v1(6150,13390) 6150,13915 ; v1(6150,16825) v1(6150,15940) v1(6150,15050) v1(6150,14160) 6150,13915
DIG4B: LED133.2 LED141.2 LED149.2 LED157.2 LED165.2 LED173.2 LED181.2 LED189.2 MAX3.3 | length 8569.8
  Top Layer w15: LED189.2@6000,3505.56 6000,3560 6050,3610 v1(6150,3610) ; LED181.2@6000,4395.56 6000,4450 6050,4500 v1(6150,4500) ; LED173.2@6000,5285.56 6000,5340 6050,5390 v1(6150,5390) ; LED165.2@6000,6170.56 6000,6225 6050,6275 v1(6150,6275) ; LED157.2@6000,7063.56 6000,7120 6030,7150 6100,7150 6150,7100 v1(6150,7050) ; LED149.2@6000,7953.56 6000,8010 6030,8040 6100,8040 6150,7990 v1(6150,7940) ; LED141.2@6000,8843.56 6000,8900 6030,8930 6100,8930 6150,8880 v1(6150,8830) ; LED133.2@6000,9728.56 6000,9785 6030,9815 6100,9815 6150,9765 v1(6150,9715)
  Bottom Layer w15: MAX3.3@5744.13,6735 6150,6735 ; v1(6150,3610) v1(6150,4500) v1(6150,5390) v1(6150,6275) 6150,6735 ; v1(6150,9715) v1(6150,8830) v1(6150,7940) v1(6150,7050) 6150,6735